# EAGLE board BlackBoard-Artemis-Panel (EAGLE 9.3.0), part 1 of 2
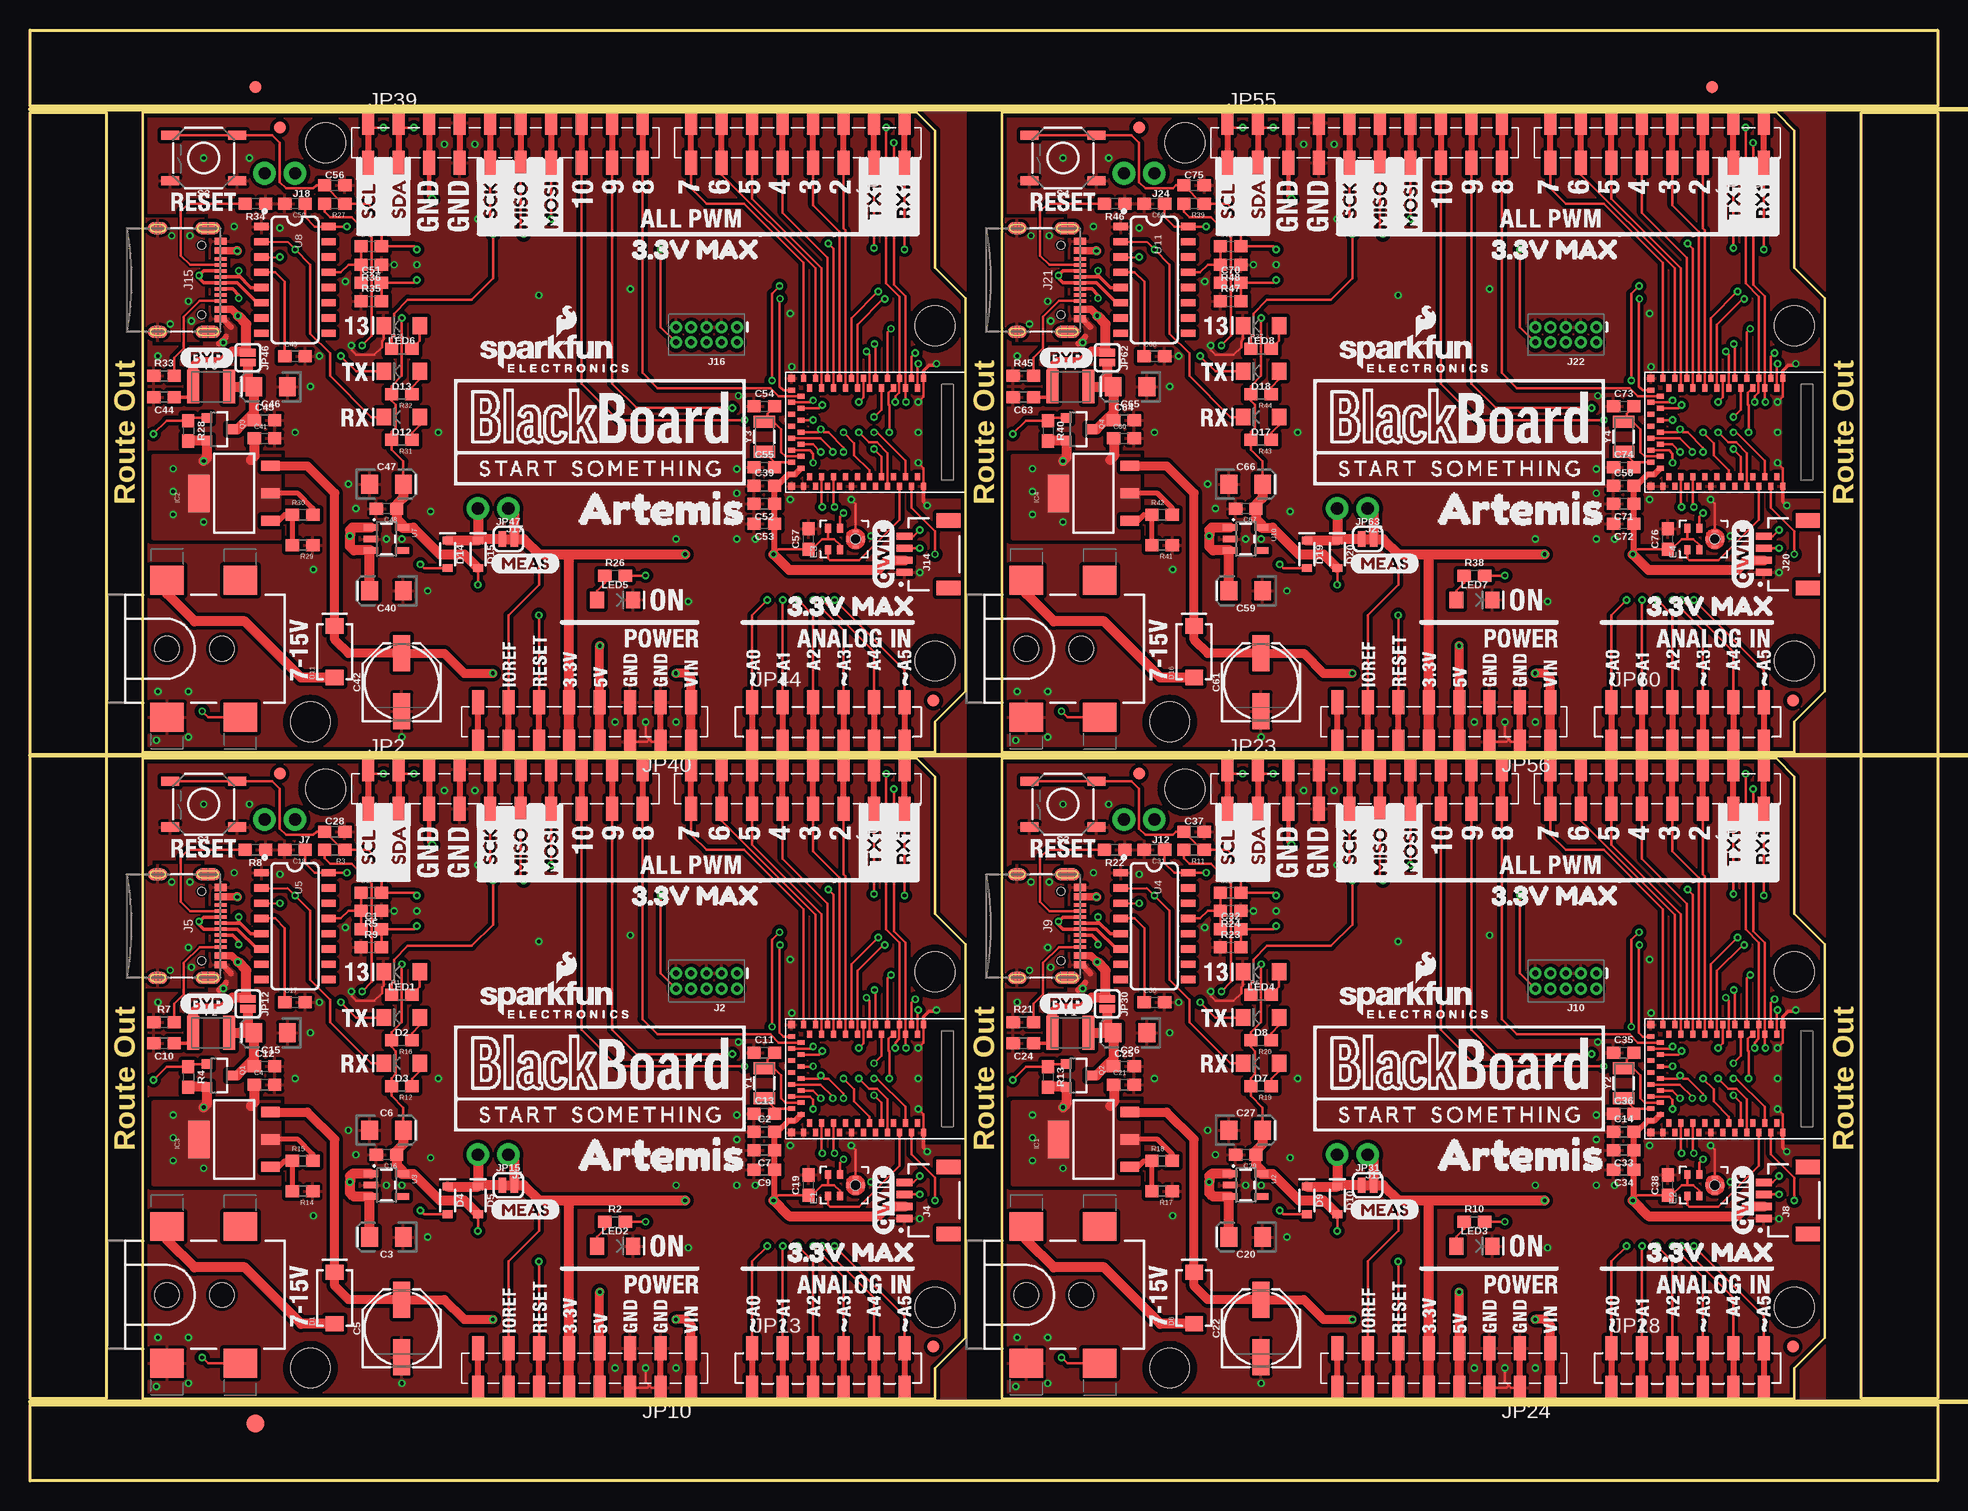
[diagram p0: board, top side]
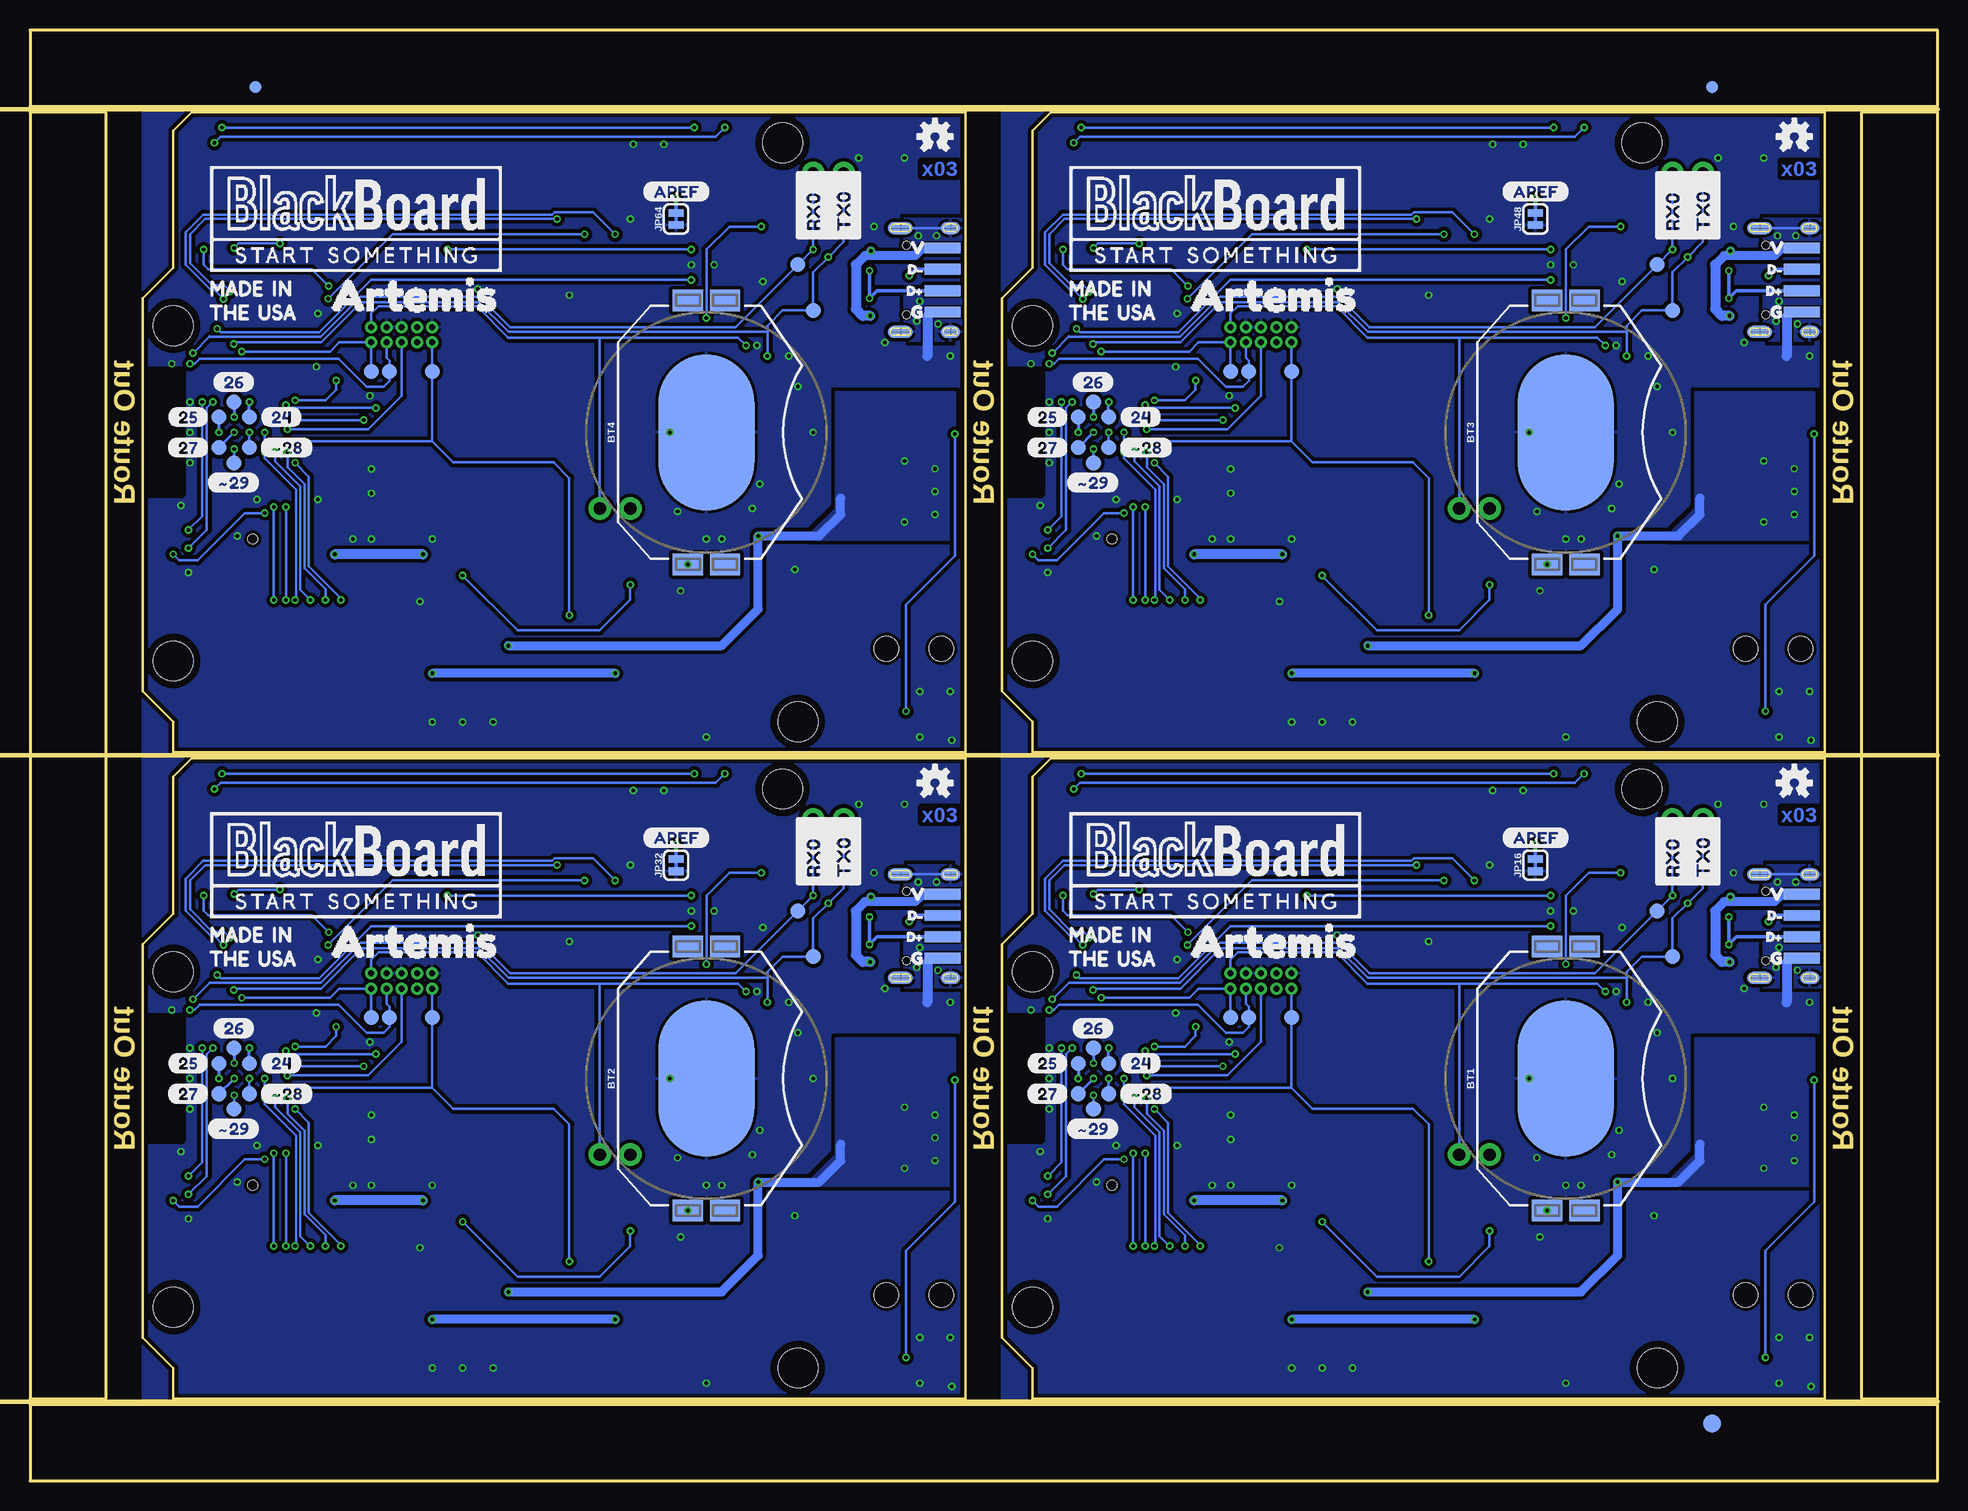
[diagram p1: board, bottom side, seen from below]

Size 159 x 120.9 mm. Coordinates in mm from the lower left corner, seen from the top.
Outline: 9.4,60.2 73.91,60.2 75.44,58.67 75.44,47.24 77.98,44.7 77.98,11.94 75.44,9.4 75.44,6.86 9.4,6.86 9.4,60.2
Outline: 81.03,60.2 145.54,60.2 147.07,58.67 147.07,47.24 149.61,44.7 149.61,11.94 147.07,9.4 147.07,6.86 81.03,6.86 81.03,60.2
Outline: 9.4,114.05 73.91,114.05 75.44,112.52 75.44,101.09 77.98,98.55 77.98,65.79 75.44,63.25 75.44,60.71 9.4,60.71 9.4,114.05
Outline: 81.03,114.05 145.54,114.05 147.07,112.52 147.07,101.09 149.61,98.55 149.61,65.79 147.07,63.25 147.07,60.71 81.03,60.71 81.03,114.05
Outline: 0,6.35 159,6.35 159,0 0,0 0,6.35
Outline: 152.65,114.05 159,114.05 159,6.86 152.65,6.86 152.65,114.05
Outline: 0,120.9 159,120.9 159,114.55 0,114.55 0,120.9
Outline: 0,114.05 6.35,114.05 6.35,6.86 0,6.86 0,114.05
Copper layers (1*16): Top 0.035mm / dielectric 1.5mm / Bottom 0.035mm
Design rules "SparkFun-2-layer-PCBWay-LIMIT": minimum track width 6mil, minimum drill 0.3mm, track to track 6mil, track to pad 6mil, pad to pad 6mil, via to via 6mil, smd to smd 6mil, copper to edge 6mil, drill to drill 6mil, minimum pad ring 6mil, minimum via ring 6mil, stop-mask expansion 4mil, vias tented up to drill 25mil, thermal gap 10mil
Net classes: 0 default: width 0 mm, drill 0 mm; 1 power: width 0.762 mm
tRestrict: area 74.8,28.4 to 78,38.6; area 146.4,28.4 to 149.6,38.6; area 74.8,82.3 to 78,92.5; area 146.4,82.3 to 149.6,92.5
bRestrict: area 74.8,28.4 to 78,38.6; area 146.4,28.4 to 149.6,38.6; area 74.8,82.3 to 78,92.5; area 146.4,82.3 to 149.6,92.5
vRestrict: area 10,29.2 to 11.4,37.5; area 15.1,30 to 16.8,37.5; area 57.3,17.7 to 57.9,18.2; area 59.8,17.5 to 60.3,18.4; area 20.7,36.2 to 22.1,38.5; area 9.7,19.8 to 18.8,31.9; area 81.7,29.2 to 83.1,37.5; area 86.7,30 to 88.4,37.5; area 128.9,17.7 to 129.5,18.2; area 131.4,17.5 to 132,18.4; area 92.3,36.2 to 93.7,38.5; area 81.3,19.8 to 90.4,31.9; 12 more areas
Milling: 3 lines

## Footprints (pad centres in the part's own frame; a part is rotated, then mirrored left to right if it is on the bottom)
BATTCON_20MM_4LEGS_OVERPASTE = smd 1.778 x 2.54: 1 -11,1.55; 3 11,1.55; P$1 -11,-1.55; P$2 11,-1.55 | smd 13 x 8: 2 0,0
0603 = smd 1.1 x 1: 1 -0.85,0; 2 0.85,0
EIA3216 = smd 1.4 x 1.6: + 1.4,0; - -1.4,0
PANASONIC_D = smd 3 x 1.4: + 2.4,0; - -2.4,0
SMA-DIODE = smd 1.27 x 1.47: A -2.15,0; C 2.15,0
LED-1206 = smd 1.2 x 1.4: A -1.5,0; C 1.5,0
SOD-323 = smd 0.63 x 0.83: A 1.15,0; C -1.15,0
SPH0641LM4H-1_MICROPHONE = smd 0.725 x 0.522: 1 -0.9,1.3; 2 -0.9,0.3; 4 0.9,0.3; 5 0.9,1.3 | smd 0.5 x 0.2: 3 0,-1.65; 8 0,-0.35 | smd 0.2 x 0.5: 6 -0.65,-1; 7 0.65,-1 | hole 0.8: 0,-1
FIDUCIAL-1X2 = smd 1 x 1: 1 0,0
FIDUCIAL-1.5X3 = smd 1.5 x 1.5: 1 0,0
1210 = smd 1 x 2.8: 1 -1.5,0; 2 1.5,0
SOT223-ALT1 = smd 0.838 x 1.524: 1 -2.271,-3.02; 2 0,-3.02; 3 2.288,-3.02 | smd 3.124 x 1.778: 4 0,2.921
1X02_NO_SILK = drill 1.016 pad 1.88: 1 0,0; 2 2.54,0
2X5-PTH-1.27MM-NO_SILK = drill 0.508 pad 1: 1 -2.54,-0.635; 2 -2.54,0.635; 3 -1.27,-0.635; 4 -1.27,0.635; 5 0,-0.635; 6 0,0.635; 7 1.27,-0.635; 8 1.27,0.635; 9 2.54,-0.635; 10 2.54,0.635
POWER_JACK_SMD_OVERPASTE_TOE = smd 2.8 x 2.4: GND 0,-5.7; P$4 6.1,-5.7; VIN0 0,5.7; VIN1 6.1,5.7 | hole 2.032: 0,0; 4.572,0
JST04_1MM_RA = smd 0.6 x 1.35: 1 -1.5,0; 2 -0.5,0; 3 0.5,0; 4 1.5,0 | smd 1.2 x 2: NC1 2.8,-3.675; NC2 -2.8,-3.675
USB-C-16P = smd 0.3 x 1.016: A5 -1.25,0.154; A6 -0.25,0.154; A7 0.25,0.154; A8 1.25,0.154; B5 1.75,0.154; B6 0.75,0.154; B7 -0.75,0.154; B8 -1.75,0.154 | smd 0.6 x 1.016: GND -3.225,0.154; GND2 3.225,0.154 | smd 1 x 2.1: SHLD1 -4.32,-0.915; SHLD2 4.32,-0.915 | smd 1 x 2.1 bottom: SHLD3 -4.32,-0.915; SHLD4 4.32,-0.915 | smd 1 x 1.6: SHLD5 -4.32,-5.095; SHLD8 4.32,-5.095 | smd 1 x 1.6 bottom: SHLD6 -4.32,-5.095; SHLD7 4.32,-5.095 | smd 0.55 x 1.016: VBUS1 -2.45,0.154; VBUS2 2.45,0.154 | hole 0.65: -2.89,-1.445; 2.89,-1.445
1X10_SMD_COMBINED = smd 1 x 2: 1A 0,1.65; 1B 0,-1.65; 2A 2.54,1.65; 2B 2.54,-1.65; 3A 5.08,1.65; 3B 5.08,-1.65; 4A 7.62,1.65; 4B 7.62,-1.65; 5A 10.16,1.65; 5B 10.16,-1.65; 6A 12.7,1.65; 6B 12.7,-1.65; 7A 15.24,1.65; 7B 15.24,-1.65; 8A 17.78,1.65; 8B 17.78,-1.65; 9A 20.32,1.65; 9B 20.32,-1.65; 10A 22.86,1.65; 10B 22.86,-1.65
STAND-OFF = hole 3.302: 0,0
1X08_SMD_COMBINED = smd 1 x 2: 1A 0,1.65; 1B 0,-1.65; 2A 2.54,-1.65; 2B 2.54,1.65; 3A 5.08,1.65; 3B 5.08,-1.65; 4A 7.62,-1.65; 4B 7.62,1.65; 5A 10.16,1.65; 5B 10.16,-1.65; 6A 12.7,-1.65; 6B 12.7,1.65; 7A 15.24,1.65; 7B 15.24,-1.65; 8A 17.78,-1.65; 8B 17.78,1.65
SMT-JUMPER_2_NO_SILK = smd 0.635 x 1.27: 1 -0.406,0; 2 0.406,0
1X06_SMD_STRAIGHT_COMBO = smd 1 x 2: 1A 0,-1.65; 1B 0,1.65; 2A 2.54,1.65; 2B 2.54,-1.65; 3A 5.08,-1.65; 3B 5.08,1.65; 4A 7.62,1.65; 4B 7.62,-1.65; 5A 10.16,-1.65; 5B 10.16,1.65; 6A 12.7,1.65; 6B 12.7,-1.65
USB-SOLDER-PADS = smd 3 x 0.9: D+ 0,-0.889; D- 0,0.889; GND 0,-2.667; VBUS 0,2.667
SMT-JUMPER_2_NC_TRACE_SILK = smd 0.635 x 1.27: 1 -0.508,0; 2 0.508,0
SOT23-3 = smd 0.8 x 0.9: 1 -0.95,-1; 2 0.95,-1; 3 0,1.1
TACTILE_SWITCH_SMD_5.2MM = smd 1.524 x 0.762: 1 -2.794,1.905; 2 2.794,1.905; 3 -2.794,-1.905; 4 2.794,-1.905
PAD.03X.05 = smd 1.27 x 1.27: P$1 0,0
ARTEMIS_FP = smd 0.4 x 0.6: AD16 -4,-3.7; BOOT 1.5,4.5; D0 0.5,-4.5; D1 -0.5,-4.5; D2 -1,-3.7; D3 2,-3.7; D7 -1.5,4.5; D8 -0.5,4.5; D9 2,3.7; D10 1,3.7; D14 -5,3.7; D17 -3.5,-4.5; D36 2.5,-4.5; D38 3,-3.7; D40 2.5,4.5; D41 -2.5,-4.5; GND@1 4.5,4.5; GND@39 -5.5,-4.5; GND@47 -1.5,-4.5; GND@59 4.5,-4.5; RXI-0 3.5,4.5; SWDCK 4,3.7; SWDIO 0,3.7; TXO-0 0.5,4.5; ~AD31 -3,-3.7; ~AD35 -2,3.7; ~D4 -2.5,4.5; ~D5 -1,3.7; ~D18 -4.5,-4.5; ~D19 -5,-3.7; ~D22 -3.5,4.5; ~D23 -4,3.7; ~D24 -3,3.7; ~D27 -4.5,4.5; ~D28 -5.5,4.5; ~D37 3.5,-4.5; ~D39 3,3.7; ~D42 1.5,-4.5; ~D43 1,-3.7; ~D44 4,-3.7; ~D45 -2,-3.7; ~RST 0,-3.7 | smd 0.6 x 0.4: AD34 -6.5,-0.5; D15 -6.5,0.5; VDD@36 -5.7,-3; VDD@37 -6.5,-3.5; XI -6.5,-2.5; XO -5.7,-2; ~AD11 -5.7,-1; ~AD12 -5.7,2; ~AD13 -5.7,1; ~AD29 -6.5,-1.5; ~AD32 -5.7,3; ~AD33/SWO -5.7,0; ~D6 -6.5,3.5; ~D25 -6.5,2.5; ~D26 -6.5,1.5 | smd 0.6 x 0.6: GND@22 -6.5,4.5; GND@38 -6.5,-4.5
SOT23-5 = smd 0.55 x 1.2: 1 -0.95,-1.3; 2 0,-1.3; 3 0.95,-1.3; 4 0.95,1.3; 5 -0.95,1.3
SO016 = smd 0.6 x 1.2: 1 -4.445,-2.8; 2 -3.175,-2.8; 3 -1.905,-2.8; 4 -0.635,-2.8; 5 0.635,-2.8; 6 1.905,-2.8; 7 3.175,-2.8; 8 4.445,-2.8; 9 4.445,2.8; 10 3.175,2.8; 11 1.905,2.8; 12 0.635,2.8; 13 -0.635,2.8; 14 -1.905,2.8; 15 -3.175,2.8; 16 -4.445,2.8
CRYSTAL-SMD-3.2X1.5MM = smd 1 x 1.8: P$1 -1.25,0; P$2 1.25,0

## Placement (x,y rotation side)
BT1  CR2032  [BATTCON_20MM_4LEGS_OVERPASTE]  30.99,33.53 90 bottom
BT2  CR2032  [BATTCON_20MM_4LEGS_OVERPASTE]  102.62,33.53 90 bottom
BT3  CR2032  [BATTCON_20MM_4LEGS_OVERPASTE]  30.99,87.38 90 bottom
BT4  CR2032  [BATTCON_20MM_4LEGS_OVERPASTE]  102.62,87.38 90 bottom
C1  2.2uF  [0603]  28.45,45.97 0 top
C2  0.1uF  [0603]  61.21,29.08 0 top
C3  10uF  [EIA3216]  29.72,20.32 180 top
C4  0.1uF  [0603]  19.56,33.02 0 top
C5  47uF  [PANASONIC_D]  30.99,12.7 90 top
C6  10uF  [EIA3216]  29.72,29.21 0 top
C7  10uF  [0603]  61.21,27.56 180 top
C8  0.1uF  [0603]  28.45,49.02 0 top
C9  1.0uF  [0603]  61.21,25.91 180 top
C10  0.1uF  [0603]  11.18,36.45 180 top
C11  15pF  [0603]  61.21,35.69 0 top
C12  0.1uF  [0603]  19.56,34.54 0 top
C13  15pF  [0603]  61.21,30.61 0 top
C14  0.1uF  [0603]  132.84,29.08 0 top
C15  10uF  [EIA3216]  20.07,37.34 180 top
C16  1.0uF  [0603]  29.72,27.18 180 top
C17  10nF  [0603]  22.1,39.88 0 top
C18  0.1uF  [0603]  22.1,52.58 180 top
C19  0.1uF  [0603]  64.9,24.64 90 top
C20  10uF  [EIA3216]  101.35,20.32 180 top
C21  0.1uF  [0603]  91.19,33.02 0 top
C22  47uF  [PANASONIC_D]  102.62,12.7 90 top
C23  0.1uF  [0603]  100.08,49.02 0 top
C24  0.1uF  [0603]  82.8,36.45 180 top
C25  0.1uF  [0603]  91.19,34.54 0 top
C26  10uF  [EIA3216]  91.69,37.34 180 top
C27  10uF  [EIA3216]  101.35,29.21 0 top
C28  1nF  [0603]  25.4,54.1 0 top
C29  1.0uF  [0603]  101.35,27.18 180 top
C30  10nF  [0603]  93.73,39.88 0 top
C31  0.1uF  [0603]  93.73,52.58 180 top
C32  2.2uF  [0603]  100.08,45.97 0 top
C33  10uF  [0603]  132.84,27.56 180 top
C34  1.0uF  [0603]  132.84,25.91 180 top
C35  15pF  [0603]  132.84,35.69 0 top
C36  15pF  [0603]  132.84,30.61 0 top
C37  1nF  [0603]  97.03,54.1 0 top
C38  0.1uF  [0603]  136.53,24.64 90 top
C39  0.1uF  [0603]  61.21,82.93 0 top
C40  10uF  [EIA3216]  29.72,74.17 180 top
C41  0.1uF  [0603]  19.56,86.87 0 top
C42  47uF  [PANASONIC_D]  30.99,66.55 90 top
C43  0.1uF  [0603]  28.45,102.87 0 top
C44  0.1uF  [0603]  11.18,90.3 180 top
C45  0.1uF  [0603]  19.56,88.39 0 top
C46  10uF  [EIA3216]  20.07,91.19 180 top
C47  10uF  [EIA3216]  29.72,83.06 0 top
C48  1.0uF  [0603]  29.72,81.03 180 top
C49  10nF  [0603]  22.1,93.73 0 top
C50  0.1uF  [0603]  22.1,106.43 180 top
C51  2.2uF  [0603]  28.45,99.82 0 top
C52  10uF  [0603]  61.21,81.41 180 top
C53  1.0uF  [0603]  61.21,79.76 180 top
C54  15pF  [0603]  61.21,89.54 0 top
C55  15pF  [0603]  61.21,84.45 0 top
C56  1nF  [0603]  25.4,107.95 0 top
C57  0.1uF  [0603]  64.9,78.49 90 top
C58  0.1uF  [0603]  132.84,82.93 0 top
C59  10uF  [EIA3216]  101.35,74.17 180 top
C60  0.1uF  [0603]  91.19,86.87 0 top
C61  47uF  [PANASONIC_D]  102.62,66.55 90 top
C62  0.1uF  [0603]  100.08,102.87 0 top
C63  0.1uF  [0603]  82.8,90.3 180 top
C64  0.1uF  [0603]  91.19,88.39 0 top
C65  10uF  [EIA3216]  91.69,91.19 180 top
C66  10uF  [EIA3216]  101.35,83.06 0 top
C67  1.0uF  [0603]  101.35,81.03 180 top
C68  10nF  [0603]  93.73,93.73 0 top
C69  0.1uF  [0603]  93.73,106.43 180 top
C70  2.2uF  [0603]  100.08,99.82 0 top
C71  10uF  [0603]  132.84,81.41 180 top
C72  1.0uF  [0603]  132.84,79.76 180 top
C73  15pF  [0603]  132.84,89.54 0 top
C74  15pF  [0603]  132.84,84.45 0 top
C75  1nF  [0603]  97.03,107.95 0 top
C76  0.1uF  [0603]  136.53,78.49 90 top
D1  1A/40V/500mV  [SMA-DIODE]  25.4,15.24 90 top
D2  GREEN  [LED-1206]  30.99,38.61 180 top
D3  Yellow  [LED-1206]  30.99,34.8 180 top
D4  1A/23V/620mV  [SOD-323]  34.8,23.37 270 top
D5  1A/23V/620mV  [SOD-323]  37.34,23.37 270 top
D6  1A/40V/500mV  [SMA-DIODE]  97.03,15.24 90 top
D7  Yellow  [LED-1206]  102.62,34.8 180 top
D8  GREEN  [LED-1206]  102.62,38.61 180 top
D9  1A/23V/620mV  [SOD-323]  106.43,23.37 270 top
D10  1A/23V/620mV  [SOD-323]  108.97,23.37 270 top
D11  1A/40V/500mV  [SMA-DIODE]  25.4,69.09 90 top
D12  Yellow  [LED-1206]  30.99,88.65 180 top
D13  GREEN  [LED-1206]  30.99,92.46 180 top
D14  1A/23V/620mV  [SOD-323]  34.8,77.22 270 top
D15  1A/23V/620mV  [SOD-323]  37.34,77.22 270 top
D16  1A/40V/500mV  [SMA-DIODE]  97.03,69.09 90 top
D17  Yellow  [LED-1206]  102.62,88.65 180 top
D18  GREEN  [LED-1206]  102.62,92.46 180 top
D19  1A/23V/620mV  [SOD-323]  106.43,77.22 270 top
D20  1A/23V/620mV  [SOD-323]  108.97,77.22 270 top
E1  SPH0641LM4H-1  [SPH0641LM4H-1_MICROPHONE]  67.82,24.64 90 top
E2  SPH0641LM4H-1  [SPH0641LM4H-1_MICROPHONE]  139.45,24.64 90 top
E3  SPH0641LM4H-1  [SPH0641LM4H-1_MICROPHONE]  67.82,78.49 90 top
E4  SPH0641LM4H-1  [SPH0641LM4H-1_MICROPHONE]  139.45,78.49 90 top
E$1  [FIDUCIAL-1X2]  18.8,116.14 0 top
E$2  [FIDUCIAL-1X2]  18.8,116.14 0 bottom
E$3  [FIDUCIAL-1X2]  140.21,116.14 0 top
E$4  [FIDUCIAL-1X2]  140.21,116.14 0 bottom
E$5  [FIDUCIAL-1.5X3]  18.8,4.76 0 top
E$6  [FIDUCIAL-1.5X3]  18.8,4.76 0 bottom
F1  6V/2A  [1210]  86.74,37.34 0 top
F2  6V/2A  [1210]  15.11,37.34 0 top
F3  6V/2A  [1210]  15.11,91.19 0 top
F4  6V/2A  [1210]  86.74,91.19 0 top
FRAME1  FRAME-LETTERNO_PACKAGE  [DUMMY]  117.86,28.45 270 bottom
FRAME2  FRAME-LETTERNO_PACKAGE  [DUMMY]  46.23,28.45 270 bottom
FRAME3  FRAME-LETTERNO_PACKAGE  [DUMMY]  46.23,82.3 270 bottom
FRAME4  FRAME-LETTERNO_PACKAGE  [DUMMY]  117.86,82.3 270 bottom
IC1  LM1117  [SOT223-ALT1]  88.65,28.45 90 top
IC2  LM1117  [SOT223-ALT1]  17.02,82.3 90 top
IC3  LM1117  [SOT223-ALT1]  17.02,28.45 90 top
IC4  LM1117  [SOT223-ALT1]  88.65,82.3 90 top
J1  [1X02_NO_SILK]  39.88,27.18 180 top
J2  CORTEX_DEBUG  [2X5-PTH-1.27MM-NO_SILK]  56.39,41.66 180 top
J3  POWER_JACKTOE  [POWER_JACK_SMD_OVERPASTE_TOE]  11.43,15.49 0 top
J4  [JST04_1MM_RA]  72.9,23.37 90 top
J5  USB-C  [USB-C-16P]  15.75,46.23 270 top
J6  POWER_JACKTOE  [POWER_JACK_SMD_OVERPASTE_TOE]  83.06,15.49 0 top
J7  [1X02_NO_SILK]  22.1,55.12 180 top
J8  [JST04_1MM_RA]  144.53,23.37 90 top
J9  USB-C  [USB-C-16P]  87.38,46.23 270 top
J10  CORTEX_DEBUG  [2X5-PTH-1.27MM-NO_SILK]  128.02,41.66 180 top
J11  [1X02_NO_SILK]  111.51,27.18 180 top
J12  [1X02_NO_SILK]  93.73,55.12 180 top
J13  POWER_JACKTOE  [POWER_JACK_SMD_OVERPASTE_TOE]  11.43,69.34 0 top
J14  [JST04_1MM_RA]  72.9,77.22 90 top
J15  USB-C  [USB-C-16P]  15.75,100.08 270 top
J16  CORTEX_DEBUG  [2X5-PTH-1.27MM-NO_SILK]  56.39,95.5 180 top
J17  [1X02_NO_SILK]  39.88,81.03 180 top
J18  [1X02_NO_SILK]  22.1,108.97 180 top
J19  POWER_JACKTOE  [POWER_JACK_SMD_OVERPASTE_TOE]  83.06,69.34 0 top
J20  [JST04_1MM_RA]  144.53,77.22 90 top
J21  USB-C  [USB-C-16P]  87.38,100.08 270 top
J22  CORTEX_DEBUG  [2X5-PTH-1.27MM-NO_SILK]  128.02,95.5 180 top
J23  [1X02_NO_SILK]  111.51,81.03 180 top
J24  [1X02_NO_SILK]  93.73,108.97 180 top
JP1  SFE_LOGO_NAME.1_INCH  [SFE_LOGO_NAME_.1]  43.05,40.26 0 top
JP2  M10SMD_COMBO  [1X10_SMD_COMBINED]  28.19,57.66 0 top
JP3  STAND-OFF  [STAND-OFF]  23.37,9.4 0 top
JP4  STAND-OFF  [STAND-OFF]  75.44,14.48 0 top
JP5  STAND-OFF  [STAND-OFF]  75.44,42.42 0 top
JP6  STAND-OFF  [STAND-OFF]  24.64,57.66 0 top
JP7  SFE_LOGO_FLAME.1_INCH  [SFE_LOGO_FLAME_.1]  44.7,42.8 0 top
JP8  FIDUCIAL1X2  [FIDUCIAL-1X2]  75.31,11.18 0 top
JP9  FIDUCIAL1X2  [FIDUCIAL-1X2]  20.83,58.93 0 top
JP10  [1X08_SMD_COMBINED]  55.12,9.4 180 top
JP11  JP11  [1X08_SMD_COMBINED]  72.9,57.66 180 top
JP12  [SMT-JUMPER_2_NO_SILK]  18.16,39.75 270 top
JP13  [1X06_SMD_STRAIGHT_COMBO]  60.2,9.4 0 top
JP14  USB_SOLDER_PADS  [USB-SOLDER-PADS]  11.3,46.23 0 bottom
JP15  [SMT-JUMPER_2_NC_TRACE_SILK]  39.88,24.64 0 top
JP16  [SMT-JUMPER_2_NC_TRACE_SILK]  33.53,51.31 90 bottom
JP17  STAND-OFF  [STAND-OFF]  95,9.4 0 top
JP18  STAND-OFF  [STAND-OFF]  147.07,14.48 0 top
JP19  STAND-OFF  [STAND-OFF]  147.07,42.42 0 top
JP20  STAND-OFF  [STAND-OFF]  96.27,57.66 0 top
JP21  FIDUCIAL1X2  [FIDUCIAL-1X2]  146.94,11.18 0 top
JP22  FIDUCIAL1X2  [FIDUCIAL-1X2]  92.46,58.93 0 top
JP23  M10SMD_COMBO  [1X10_SMD_COMBINED]  99.82,57.66 0 top
JP24  [1X08_SMD_COMBINED]  126.75,9.4 180 top
JP25  SFE_LOGO_NAME.1_INCH  [SFE_LOGO_NAME_.1]  114.68,40.26 0 top
JP26  SFE_LOGO_FLAME.1_INCH  [SFE_LOGO_FLAME_.1]  116.33,42.8 0 top
JP27  JP11  [1X08_SMD_COMBINED]  144.53,57.66 180 top
JP28  [1X06_SMD_STRAIGHT_COMBO]  131.83,9.4 0 top
JP29  USB_SOLDER_PADS  [USB-SOLDER-PADS]  82.93,46.23 0 bottom
JP30  [SMT-JUMPER_2_NO_SILK]  89.79,39.75 270 top
JP31  [SMT-JUMPER_2_NC_TRACE_SILK]  111.51,24.64 0 top
JP32  [SMT-JUMPER_2_NC_TRACE_SILK]  105.16,51.31 90 bottom
JP33  STAND-OFF  [STAND-OFF]  23.37,63.25 0 top
JP34  STAND-OFF  [STAND-OFF]  75.44,68.33 0 top
JP35  STAND-OFF  [STAND-OFF]  75.44,96.27 0 top
JP36  STAND-OFF  [STAND-OFF]  24.64,111.51 0 top
JP37  FIDUCIAL1X2  [FIDUCIAL-1X2]  75.31,65.02 0 top
JP38  FIDUCIAL1X2  [FIDUCIAL-1X2]  20.83,112.78 0 top
JP39  M10SMD_COMBO  [1X10_SMD_COMBINED]  28.19,111.51 0 top
JP40  [1X08_SMD_COMBINED]  55.12,63.25 180 top
JP41  SFE_LOGO_NAME.1_INCH  [SFE_LOGO_NAME_.1]  43.05,94.11 0 top
JP42  SFE_LOGO_FLAME.1_INCH  [SFE_LOGO_FLAME_.1]  44.7,96.65 0 top
JP43  JP11  [1X08_SMD_COMBINED]  72.9,111.51 180 top
JP44  [1X06_SMD_STRAIGHT_COMBO]  60.2,63.25 0 top
JP45  USB_SOLDER_PADS  [USB-SOLDER-PADS]  11.3,100.08 0 bottom
JP46  [SMT-JUMPER_2_NO_SILK]  18.16,93.6 270 top
JP47  [SMT-JUMPER_2_NC_TRACE_SILK]  39.88,78.49 0 top
JP48  [SMT-JUMPER_2_NC_TRACE_SILK]  33.53,105.16 90 bottom
JP49  STAND-OFF  [STAND-OFF]  95,63.25 0 top
JP50  STAND-OFF  [STAND-OFF]  147.07,68.33 0 top
JP51  STAND-OFF  [STAND-OFF]  147.07,96.27 0 top
JP52  STAND-OFF  [STAND-OFF]  96.27,111.51 0 top
JP53  FIDUCIAL1X2  [FIDUCIAL-1X2]  146.94,65.02 0 top
JP54  FIDUCIAL1X2  [FIDUCIAL-1X2]  92.46,112.78 0 top
JP55  M10SMD_COMBO  [1X10_SMD_COMBINED]  99.82,111.51 0 top
JP56  [1X08_SMD_COMBINED]  126.75,63.25 180 top
JP57  SFE_LOGO_NAME.1_INCH  [SFE_LOGO_NAME_.1]  114.68,94.11 0 top
JP58  SFE_LOGO_FLAME.1_INCH  [SFE_LOGO_FLAME_.1]  116.33,96.65 0 top
JP59  JP11  [1X08_SMD_COMBINED]  144.53,111.51 180 top
JP60  [1X06_SMD_STRAIGHT_COMBO]  131.83,63.25 0 top
JP61  USB_SOLDER_PADS  [USB-SOLDER-PADS]  82.93,100.08 0 bottom
JP62  [SMT-JUMPER_2_NO_SILK]  89.79,93.6 270 top
JP63  [SMT-JUMPER_2_NC_TRACE_SILK]  111.51,78.49 0 top
JP64  [SMT-JUMPER_2_NC_TRACE_SILK]  105.16,105.16 90 bottom
LED1  BLUE  [LED-1206]  30.99,42.42 180 top
LED2  GREEN  [LED-1206]  48.77,19.56 0 top
LED3  GREEN  [LED-1206]  120.4,19.56 0 top
LED4  BLUE  [LED-1206]  102.62,42.42 180 top
LED5  GREEN  [LED-1206]  48.77,73.41 0 top
LED6  BLUE  [LED-1206]  30.99,96.27 180 top
LED7  GREEN  [LED-1206]  120.4,73.41 0 top
LED8  BLUE  [LED-1206]  102.62,96.27 180 top
Q1  1.1A/60V/600mΩ  [SOT23-3]  15.75,33.78 270 top
Q2  1.1A/60V/600mΩ  [SOT23-3]  87.38,33.78 270 top
Q3  1.1A/60V/600mΩ  [SOT23-3]  15.75,87.63 270 top
Q4  1.1A/60V/600mΩ  [SOT23-3]  87.38,87.63 270 top
R1  4.7k  [0603]  30.99,40.51 0 top
R2  10k  [0603]  48.77,21.59 0 top
R3  100k  [0603]  25.4,52.58 180 top
R4  10k  [0603]  13.21,33.66 270 top
R5  100k  [0603]  28.45,47.5 180 top
R6  4.7k  [0603]  102.62,40.51 0 top
R7  5.1k  [0603]  11.18,38.23 0 top
R8  5.1k  [0603]  18.8,52.58 180 top
R9  10k  [0603]  28.45,44.45 0 top
R10  10k  [0603]  120.4,21.59 0 top
R11  100k  [0603]  97.03,52.58 180 top
R12  4.7k  [0603]  30.99,32.89 180 top
R13  10k  [0603]  84.84,33.66 270 top
R14  715  [0603]  22.73,24.13 180 top
R15  240  [0603]  22.73,26.67 0 top
R16  4.7k  [0603]  30.99,36.7 180 top
R17  715  [0603]  94.36,24.13 180 top
R18  240  [0603]  94.36,26.67 0 top
R19  4.7k  [0603]  102.62,32.89 180 top
R20  4.7k  [0603]  102.62,36.7 180 top
R21  5.1k  [0603]  82.8,38.23 0 top
R22  5.1k  [0603]  90.42,52.58 180 top
R23  10k  [0603]  100.08,44.45 0 top
R24  100k  [0603]  100.08,47.5 180 top
R25  4.7k  [0603]  30.99,94.36 0 top
R26  10k  [0603]  48.77,75.44 0 top
R27  100k  [0603]  25.4,106.43 180 top
R28  10k  [0603]  13.21,87.5 270 top
R29  715  [0603]  22.73,77.98 180 top
R30  240  [0603]  22.73,80.52 0 top
R31  4.7k  [0603]  30.99,86.74 180 top
R32  4.7k  [0603]  30.99,90.55 180 top
R33  5.1k  [0603]  11.18,92.08 0 top
R34  5.1k  [0603]  18.8,106.43 180 top
R35  10k  [0603]  28.45,98.3 0 top
R36  100k  [0603]  28.45,101.35 180 top
R37  4.7k  [0603]  102.62,94.36 0 top
R38  10k  [0603]  120.4,75.44 0 top
R39  100k  [0603]  97.03,106.43 180 top
R40  10k  [0603]  84.84,87.5 270 top
R41  715  [0603]  94.36,77.98 180 top
R42  240  [0603]  94.36,80.52 0 top
R43  4.7k  [0603]  102.62,86.74 180 top
R44  4.7k  [0603]  102.62,90.55 180 top
R45  5.1k  [0603]  82.8,92.08 0 top
R46  5.1k  [0603]  90.42,106.43 180 top
R47  10k  [0603]  100.08,98.3 0 top
R48  100k  [0603]  100.08,101.35 180 top
S1  [TACTILE_SWITCH_SMD_5.2MM]  14.48,56.39 180 top
S2  [TACTILE_SWITCH_SMD_5.2MM]  86.11,56.39 180 top
S3  [TACTILE_SWITCH_SMD_5.2MM]  14.48,110.24 180 top
S4  [TACTILE_SWITCH_SMD_5.2MM]  86.11,110.24 180 top
TP1  [PAD.03X.05]  57.4,38.61 90 bottom
TP2  [PAD.03X.05]  58.93,38.61 90 bottom
TP3  [PAD.03X.05]  53.85,38.61 0 bottom
TP4  [PAD.03X.05]  129.03,38.61 90 bottom
TP5  TEST-POINT3X5  [PAD.03X.05]  23.37,47.5 90 bottom
TP6  TEST-POINT3X5  [PAD.03X.05]  22.1,43.69 90 bottom
TP7  [PAD.03X.05]  130.56,38.61 90 bottom
TP8  [PAD.03X.05]  70.36,30.99 270 bottom
TP9  [PAD.03X.05]  69.09,32.26 270 bottom
TP10  TEST-POINT3X5  [PAD.03X.05]  95,47.5 90 bottom
TP11  [PAD.03X.05]  71.63,32.26 0 bottom
TP12  [PAD.03X.05]  69.09,34.8 0 bottom
TP13  [PAD.03X.05]  71.63,34.8 0 bottom
TP14  [PAD.03X.05]  70.36,36.07 0 bottom
TP15  TEST-POINT3X5  [PAD.03X.05]  93.73,43.69 90 bottom
TP16  [PAD.03X.05]  125.48,38.61 0 bottom
TP17  [PAD.03X.05]  141.99,30.99 270 bottom
TP18  [PAD.03X.05]  140.72,32.26 270 bottom
TP19  [PAD.03X.05]  143.26,32.26 0 bottom
TP20  [PAD.03X.05]  140.72,34.8 0 bottom
TP21  [PAD.03X.05]  143.26,34.8 0 bottom
TP22  [PAD.03X.05]  141.99,36.07 0 bottom
TP23  [PAD.03X.05]  57.4,92.46 90 bottom
TP24  [PAD.03X.05]  58.93,92.46 90 bottom
TP25  TEST-POINT3X5  [PAD.03X.05]  23.37,101.35 90 bottom
TP26  TEST-POINT3X5  [PAD.03X.05]  22.1,97.54 90 bottom
TP27  [PAD.03X.05]  53.85,92.46 0 bottom
TP28  [PAD.03X.05]  70.36,84.84 270 bottom
TP29  [PAD.03X.05]  69.09,86.11 270 bottom
TP30  [PAD.03X.05]  71.63,86.11 0 bottom
TP31  [PAD.03X.05]  69.09,88.65 0 bottom
TP32  [PAD.03X.05]  71.63,88.65 0 bottom
TP33  [PAD.03X.05]  70.36,89.92 0 bottom
TP34  [PAD.03X.05]  129.03,92.46 90 bottom
TP35  [PAD.03X.05]  130.56,92.46 90 bottom
TP36  TEST-POINT3X5  [PAD.03X.05]  95,101.35 90 bottom
TP37  TEST-POINT3X5  [PAD.03X.05]  93.73,97.54 90 bottom
TP38  [PAD.03X.05]  125.48,92.46 0 bottom
TP39  [PAD.03X.05]  141.99,84.84 270 bottom
TP40  [PAD.03X.05]  140.72,86.11 270 bottom
TP41  [PAD.03X.05]  143.26,86.11 0 bottom
TP42  [PAD.03X.05]  140.72,88.65 0 bottom
TP43  [PAD.03X.05]  143.26,88.65 0 bottom
TP44  [PAD.03X.05]  141.99,89.92 0 bottom
U1  ARTEMIS_MODULESMD  [ARTEMIS_FP]  69.98,33.53 0 top
U2  AP2112-3.3V  [SOT23-5]  101.35,24.64 270 top
U3  AP2112-3.3V  [SOT23-5]  29.72,24.64 270 top
U4  CH340C  [SO016]  93.73,46.23 270 top
U5  CH340C  [SO016]  22.1,46.23 270 top
U6  ARTEMIS_MODULESMD  [ARTEMIS_FP]  141.6,33.53 0 top
U7  AP2112-3.3V  [SOT23-5]  29.72,78.49 270 top
U8  CH340C  [SO016]  22.1,100.08 270 top
U9  ARTEMIS_MODULESMD  [ARTEMIS_FP]  69.98,87.38 0 top
U10  AP2112-3.3V  [SOT23-5]  101.35,78.49 270 top
U11  CH340C  [SO016]  93.73,100.08 270 top
U12  ARTEMIS_MODULESMD  [ARTEMIS_FP]  141.6,87.38 0 top
U$1  [BLACKBOARDLOGO#PNG]  47.5,33.53 0 top
U$2  [D#3]  14.99,45.34 0 bottom
U$3  [BLACKBOARDLOGO#PNG]  60.2,51.31 0 bottom
U$4  [MADEINUSA#PNG]  68.83,44.45 0 bottom
U$5  OSHW-LOGOS  [OSHW-LOGO-S]  83.57,58.17 0 bottom
U$6  [BLACKBOARDLOGO#PNG]  119.13,33.53 0 top
U$7  [BLACKBOARDLOGO#PNG]  131.83,51.31 0 bottom
U$8  [MADEINUSA#PNG]  140.46,44.45 0 bottom
U$9  [QWIIC_COPYRIGHT_SMALL]  71.12,23.37 90 top
U$10  [D#4]  14.86,47.12 0 bottom
U$11  [G1]  14.86,43.56 0 bottom
U$12  [V0]  14.86,48.89 0 bottom
U$13  [3#3V_MAX2]  61.72,19.05 0 top
U$14  [ARTEMIS0]  43.43,27.18 0 top
U$15  [ARTEMIS0]  64.52,44.96 0 bottom
U$16  OSHW-LOGOS  [OSHW-LOGO-S]  11.94,58.17 0 bottom
U$17  [#284]  68.2,32.26 0 bottom
U$18  [SCL1]  28.19,50.29 90 top
U$19  [#295]  72.64,29.34 0 bottom
U$20  [AREF2]  36.32,53.59 0 bottom
U$21  [240]  68.2,34.8 0 bottom
U$22  [SDA0]  30.73,50.29 90 top
U$23  [251]  75.95,34.8 0 bottom
U$24  [262]  72.14,37.72 0 bottom
U$25  [273]  75.95,32.26 0 bottom
U$26  [QWIIC_COPYRIGHT_SMALL]  142.75,23.37 90 top
U$27  [G1]  86.49,43.56 0 bottom
U$28  [V0]  86.49,48.89 0 bottom
U$29  [D#3]  86.61,45.34 0 bottom
U$30  [D#4]  86.49,47.12 0 bottom
U$31  [ARTEMIS0]  115.06,27.18 0 top
U$32  [ARTEMIS0]  136.14,44.96 0 bottom
U$33  [MISO8]  112.52,49.4 90 top
U$34  [MOSI7]  115.06,49.4 90 top
U$35  [SCK9]  109.98,50.29 90 top
U$36  [3#3V_MAX2]  120.4,48.77 0 top
U$37  [MEAS3]  109.98,22.61 0 top
U$38  [RX11]  144.4,50.29 90 top
U$39  [TX10]  141.99,50.16 90 top
U$40  [RX01]  93.73,49.28 90 bottom
U$41  [TX00]  91.19,49.28 90 bottom
U$42  [AREF2]  107.95,53.59 0 bottom
U$43  [SCL1]  99.82,50.29 90 top
U$44  [SDA0]  102.36,50.29 90 top
U$45  [BYP0]  84.07,39.75 0 top
U$46  [3#3V_MAX2]  133.35,19.05 0 top
U$47  [MISO8]  40.89,49.4 90 top
U$48  [MOSI7]  43.43,49.4 90 top
U$49  [RX01]  22.1,49.28 90 bottom
U$50  [SCK9]  38.35,50.29 90 top
U$51  [#284]  139.83,32.26 0 bottom
U$52  [#295]  144.27,29.34 0 bottom
U$53  [TX00]  19.56,49.28 90 bottom
U$54  [240]  139.83,34.8 0 bottom
U$55  [251]  147.57,34.8 0 bottom
U$56  [262]  143.76,37.72 0 bottom
U$57  [273]  147.57,32.26 0 bottom
U$58  OSHW-LOGOS  [OSHW-LOGO-S]  11.94,112.01 0 bottom
U$59  [BLACKBOARDLOGO#PNG]  47.5,87.38 0 top
U$60  [BLACKBOARDLOGO#PNG]  60.2,105.16 0 bottom
U$61  [MADEINUSA#PNG]  68.83,98.3 0 bottom
U$62  [QWIIC_COPYRIGHT_SMALL]  71.12,77.22 90 top
U$63  [G1]  14.86,97.41 0 bottom
U$64  [V0]  14.86,102.74 0 bottom
U$65  [D#3]  14.99,99.19 0 bottom
U$66  [D#4]  14.86,100.97 0 bottom
U$67  [3#3V_MAX2]  48.77,48.77 0 top
U$68  [BYP0]  12.45,39.75 0 top
U$69  [ARTEMIS0]  43.43,81.03 0 top
U$70  [MEAS3]  38.35,22.61 0 top
U$71  [RX11]  72.77,50.29 90 top
U$72  [TX10]  70.36,50.16 90 top
U$73  [ARTEMIS0]  64.52,98.81 0 bottom
U$74  [MISO8]  40.89,103.25 90 top
U$75  [MOSI7]  43.43,103.25 90 top
U$76  [SCK9]  38.35,104.14 90 top
U$77  [3#3V_MAX2]  48.77,102.62 0 top
U$78  [MEAS3]  38.35,76.45 0 top
U$79  [RX11]  72.77,104.14 90 top
U$80  [TX10]  70.36,104.01 90 top
U$81  [RX01]  22.1,103.12 90 bottom
U$82  [TX00]  19.56,103.12 90 bottom
U$83  [AREF2]  36.32,107.44 0 bottom
U$84  [SCL1]  28.19,104.14 90 top
U$85  [SDA0]  30.73,104.14 90 top
U$86  [BYP0]  12.45,93.6 0 top
U$87  [3#3V_MAX2]  61.72,72.9 0 top
U$88  [#284]  68.2,86.11 0 bottom
U$89  [#295]  72.64,83.19 0 bottom
U$90  [240]  68.2,88.65 0 bottom
U$91  [251]  75.95,88.65 0 bottom
U$92  [262]  72.14,91.57 0 bottom
U$93  [273]  75.95,86.11 0 bottom
U$94  OSHW-LOGOS  [OSHW-LOGO-S]  83.57,112.01 0 bottom
U$95  [BLACKBOARDLOGO#PNG]  119.13,87.38 0 top
U$96  [BLACKBOARDLOGO#PNG]  131.83,105.16 0 bottom
U$97  [MADEINUSA#PNG]  140.46,98.3 0 bottom
U$98  [QWIIC_COPYRIGHT_SMALL]  142.75,77.22 90 top
U$99  [G1]  86.49,97.41 0 bottom
U$100  [V0]  86.49,102.74 0 bottom
U$101  [D#3]  86.61,99.19 0 bottom
U$102  [D#4]  86.49,100.97 0 bottom
U$103  [ARTEMIS0]  115.06,81.03 0 top
U$104  [ARTEMIS0]  136.14,98.81 0 bottom
U$105  [MISO8]  112.52,103.25 90 top
U$106  [MOSI7]  115.06,103.25 90 top
U$107  [SCK9]  109.98,104.14 90 top
U$108  [3#3V_MAX2]  120.4,102.62 0 top
U$109  [MEAS3]  109.98,76.45 0 top
U$110  [RX11]  144.4,104.14 90 top
U$111  [TX10]  141.99,104.01 90 top
U$112  [RX01]  93.73,103.12 90 bottom
U$113  [TX00]  91.19,103.12 90 bottom
U$114  [AREF2]  107.95,107.44 0 bottom
U$115  [SCL1]  99.82,104.14 90 top
U$116  [SDA0]  102.36,104.14 90 top
U$117  [BYP0]  84.07,93.6 0 top
U$118  [3#3V_MAX2]  133.35,72.9 0 top
U$119  [#284]  139.83,86.11 0 bottom
U$120  [#295]  144.27,83.19 0 bottom
U$121  [240]  139.83,88.65 0 bottom
U$122  [251]  147.57,88.65 0 bottom
U$123  [262]  143.76,91.57 0 bottom
U$124  [273]  147.57,86.11 0 bottom
Y1  32.768kHz  [CRYSTAL-SMD-3.2X1.5MM]  61.21,33.15 90 top
Y2  32.768kHz  [CRYSTAL-SMD-3.2X1.5MM]  132.84,33.15 90 top
Y3  32.768kHz  [CRYSTAL-SMD-3.2X1.5MM]  61.21,87 90 top
Y4  32.768kHz  [CRYSTAL-SMD-3.2X1.5MM]  132.84,87 90 top

## Library data of the parts
BT1-BT4 = SparkFun-Batteries; PROD_ID: PRT-11892; SF_SKU: BATT-10373
C1 C32 C51 C70 = SparkFun-Capacitors; PROD_ID: CAP-07888
C2 C4 C10 C12 C14 C18 C19 C21 C24 C25 C31 C38 C39 C41 C44 C45 C50 C57 C58 C60 C63 C64 C69 C76 = SparkFun-Capacitors; PROD_ID: CAP-00810
C3 C6 C15 C20 C26 C27 C40 C46 C47 C59 C65 C66 = SparkFun-Capacitors; PROD_ID: CAP-00811
C5 C22 C42 C61 = SparkFun-Capacitors; PROD_ID: CAP-08478
C7 C33 C52 C71 = SparkFun-Capacitors; PROD_ID: CAP-11015
C8 C23 C43 C62 = SparkFun-Capacitors; PROD_ID: CAP-08604
C9 C16 C29 C34 C48 C53 C67 C72 = SparkFun-Capacitors; PROD_ID: CAP-00868
C11 C13 C35 C36 C54 C55 C73 C74 = SparkFun-Capacitors; PROD_ID: CAP-07881
C17 C30 C49 C68 = SparkFun-Capacitors; PROD_ID: CAP-00867
C28 C37 C56 C75 = SparkFun-Capacitors; PROD_ID: CAP-07886
D1 D6 D11 D16 = SparkFun-DiscreteSemi; PROD_ID: DIO-08053
D2 D8 D13 D18 LED2 LED3 LED5 LED7 = SparkFun-LED; PROD_ID: DIO-09910
D3 D7 D12 D17 = SparkFun-LED; PROD_ID: DIO-09909
D4 D5 D9 D10 D14 D15 D19 D20 = SparkFun-DiscreteSemi; PROD_ID: DIO-11623
E1-E4 = SparkFun-Sensors; PROD_ID: IC-14361
E$1-E$4 JP1 JP7 JP25 JP26 JP41 JP42 JP57 JP58 U$5 U$16 U$58 U$94 = SparkFun-Aesthetics
E$5 E$6 = SparkFun-Retired
F1-F4 = SparkFun-Fuses; PROD_ID: RES-14313
FRAME1-FRAME4 = SparkFun-Aesthetics; DESIGNER: Nobody; VERSION: v01
IC1-IC4 = Testing; PROD_ID: VREG-08170
J1 J2 J7 J10-J12 J16-J18 J22-J24 JP14 JP29 JP45 JP61 TP1-TP44 = SparkFun-Connectors
J3 J6 J13 J19 = SparkFun-Connectors; PROD_ID: CONN-08106; SF_ID: PRT-12748
J4 J8 J14 J20 = SparkFun-Connectors; PROD_ID: CONN-13694
J5 J9 J15 J21 = SparkFun-Connectors; PROD_ID: CONN-14122; VALUE: USB Female Type C Connector
JP2 JP23 JP39 JP55 = SparkFun-Connectors; PROD_ID: CONN-11219
JP3-JP6 JP8 JP9 JP17-JP22 JP33-JP38 JP49-JP54 = SparkFun
JP10 JP11 JP24 JP27 JP40 JP43 JP56 JP59 = SparkFun-Connectors; PROD_ID: CONN-10204
JP12 JP15 JP16 JP30-JP32 JP46-JP48 JP62-JP64 = SparkFun-Jumpers
JP13 JP28 JP44 JP60 = SparkFun-Connectors; PROD_ID: CONN-10203
LED1 LED4 LED6 LED8 = SparkFun-LED; PROD_ID: DIO-09911
Q1-Q4 = SparkFun-DiscreteSemi; PROD_ID: TRANS-08285
R1 R6 R12 R16 R19 R20 R25 R31 R32 R37 R43 R44 = SparkFun-Resistors; PROD_ID: RES-07857
R2 R4 R9 R10 R13 R23 R26 R28 R35 R38 R40 R47 = SparkFun-Resistors; PROD_ID: RES-00824
R3 R5 R11 R24 R27 R36 R39 R48 = SparkFun-Resistors; PROD_ID: RES-07828
R7 R8 R21 R22 R33 R34 R45 R46 = SparkFun-Resistors; PROD_ID: RES-12083
R14 R17 R29 R41 = SparkFun-Resistors; PROD_ID: RES-07850
R15 R18 R30 R42 = SparkFun-Resistors; PROD_ID: RES-07849
S1-S4 = SparkFun-Switches; PROD_ID: SWCH-14139
U1 U6 U9 U12 = Testing
U2 U3 U7 U10 = SparkFun-PowerIC; PROD_ID: VREG-12457
U4 U5 U8 U11 = SparkFun-IC-Comms; PROD_ID: IC-14038
U$1 U$3 U$6 U$7 U$59 U$60 U$95 U$96 = blackboardlogo
U$2 U$10 U$29 U$30 U$65 U$66 U$101 U$102 = buzzard_labels (14)
U$4 U$8 U$61 U$97 = madeinusa
U$9 U$26 U$62 U$98 = Labels
U$11 U$12 U$27 U$28 U$45 U$63 U$64 U$68 U$86 U$99 U$100 U$117 = buzzard_labels (13)
U$13 U$17 U$19 U$21 U$23-U$25 U$36-U$39 U$46 U$51 U$52 U$54-U$57 U$67 U$70-U$72 U$77-U$80 U$87-U$93 U$108-U$111 U$118-U$124 = buzzard_labels (2)
U$14 U$15 U$31 U$32 U$40 U$41 U$49 U$53 U$69 U$73 U$81 U$82 U$103 U$104 U$112 U$113 = buzzard_labels (3)
U$18 U$22 U$43 U$44 U$84 U$85 U$115 U$116 = buzzard_labels (6)
U$20 U$42 U$83 U$114 = buzzard_labels (5)
U$33-U$35 U$47 U$48 U$50 U$74-U$76 U$105-U$107 = buzzard_labels (8)
Y1-Y4 = SparkFun-Clocks; PROD_ID: XTAL-13062

## Nets
3.3V: C6.+ C16.1 C18.1 D5.A R2.2 R12.2 R16.2 U3.5 U5.16
3.3V1: C27.+ C29.1 C31.1 D10.A R10.2 R19.2 R20.2 U2.5 U4.16
3.3V2: C47.+ C48.1 C50.1 D15.A R26.2 R31.2 R32.2 U7.5 U8.16
3.3V3: C66.+ C67.1 C69.1 D20.A R38.2 R43.2 R44.2 U10.5 U11.16
5V [power]: C3.+ C4.1 IC3.2 IC3.4 JP10.4A JP10.4B Q1.2 R4.2 R15.2 U3.1 U3.3
5V1 [power]: C20.+ C21.1 IC1.2 IC1.4 JP24.4A JP24.4B Q2.2 R13.2 R18.2 U2.1 U2.3
5V2 [power]: C40.+ C41.1 IC2.2 IC2.4 JP40.4A JP40.4B Q3.2 R28.2 R30.2 U7.1 U7.3
5V3 [power]: C59.+ C60.1 IC4.2 IC4.4 JP56.4A JP56.4B Q4.2 R40.2 R42.2 U10.1 U10.3
!DTR: C1.1 C8.1 R5.2 U5.13
!DTR1: C23.1 C32.1 R24.2 U4.13
!DTR2: C43.1 C51.1 R36.2 U8.13
!DTR3: C62.1 C70.1 R48.2 U11.13
!RESET: C8.2 C28.1 J2.10 JP10.6A JP10.6B R3.1 S1.3 S1.4 TP3.P$1 U1.~RST
!RESET1: C23.2 C37.1 J10.10 JP24.6A JP24.6B R11.1 S2.3 S2.4 TP16.P$1 U6.~RST
!RESET2: C43.2 C56.1 J16.10 JP40.6A JP40.6B R27.1 S3.3 S3.4 TP27.P$1 U9.~RST
!RESET3: C62.2 C75.1 J22.10 JP56.6A JP56.6B R39.1 S4.3 S4.4 TP38.P$1 U12.~RST
BOOT: C1.2 R9.2 U1.BOOT
BOOT1: C32.2 R23.2 U6.BOOT
BOOT2: C51.2 R35.2 U9.BOOT
BOOT3: C70.2 R47.2 U12.BOOT
CC1: J5.A5 R8.2
CC2: J5.B5 R7.2
CC3: J9.B5 R21.2
CC4: J9.A5 R22.2
CC5: J15.B5 R33.2
CC6: J15.A5 R34.2
CC7: J21.B5 R45.2
CC8: J21.A5 R46.2
D1: TP20.P$1 U6.D8
D2: TP21.P$1 U6.D9
D3: TP22.P$1 U6.D10
D4: TP19.P$1 U6.D38
D5: TP31.P$1 U9.D8
D6: TP32.P$1 U9.D9
D7: TP33.P$1 U9.D10
D8: TP30.P$1 U9.D38
D9: TP42.P$1 U12.D8
D10: TP43.P$1 U12.D9
D11: TP44.P$1 U12.D10
D12: TP41.P$1 U12.D38
D14/SDA: J4.3 JP2.2A JP2.2B U1.D40
D14/SDA1: J8.3 JP23.2A JP23.2B U6.D40
D14/SDA2: J14.3 JP39.2A JP39.2B U9.D40
D14/SDA3: J20.3 JP55.2A JP55.2B U12.D40
D18/A1: JP28.3A JP28.3B U6.AD34
D18/A2: JP13.3A JP13.3B U1.AD34
D18/A3: JP44.3A JP44.3B U9.AD34
D18/A4: JP60.3A JP60.3B U12.AD34
D20/A1: JP28.5A JP28.5B U6.AD16
D20/A2: JP44.5A JP44.5B U9.AD16
D20/A3: JP60.5A JP60.5B U12.AD16
D20/A4: JP13.5A JP13.5B U1.AD16
D24: TP12.P$1 U1.D8
D25: TP13.P$1 U1.D9
D26: TP14.P$1 U1.D10
D27: TP11.P$1 U1.D38
D+: J5.A6 J5.B6 JP14.D+ U5.5
D+1: J9.A6 J9.B6 JP29.D+ U4.5
D+2: J15.A6 J15.B6 JP45.D+ U8.5
D+3: J21.A6 J21.B6 JP61.D+ U11.5
D-: J5.A7 J5.B7 JP14.D- U5.6
D-1: J9.A7 J9.B7 JP29.D- U4.6
D-2: J15.A7 J15.B7 JP45.D- U8.6
D-3: J21.A7 J21.B7 JP61.D- U11.6
GND: BT1.2 C2.1 C3.- C4.2 C5.- C6.- C7.2 C9.2 C10.2 C11.1 C12.2 C13.1 C15.- C16.2 C17.2 C18.2 C19.2 C28.2 E1.3 E1.6 E1.7 E1.8 J2.3 J2.5 J2.9 J3.GND J4.1 J5.GND J5.GND2 JP2.4A JP2.4B JP10.2A JP10.2B JP10.3A JP10.3B JP14.GND JP16.1 LED1.C LED2.C R5.1 R7.1 R8.1 R9.1 R14.1 S1.1 S1.2 U1.GND@1 U1.GND@22 U1.GND@38 U1.GND@39 U1.GND@47 U1.GND@59 U3.2 U5.1
GND1: BT2.2 C14.1 C20.- C21.2 C22.- C24.2 C25.2 C26.- C27.- C29.2 C30.2 C31.2 C33.2 C34.2 C35.1 C36.1 C37.2 C38.2 E2.3 E2.6 E2.7 E2.8 J6.GND J8.1 J9.GND J9.GND2 J10.3 J10.5 J10.9 JP23.4A JP23.4B JP24.2A JP24.2B JP24.3A JP24.3B JP29.GND JP32.1 LED3.C LED4.C R17.1 R21.1 R22.1 R23.1 R24.1 S2.1 S2.2 U2.2 U4.1 U6.GND@1 U6.GND@22 U6.GND@38 U6.GND@39 U6.GND@47 U6.GND@59
GND2: BT3.2 C39.1 C40.- C41.2 C42.- C44.2 C45.2 C46.- C47.- C48.2 C49.2 C50.2 C52.2 C53.2 C54.1 C55.1 C56.2 C57.2 E3.3 E3.6 E3.7 E3.8 J13.GND J14.1 J15.GND J15.GND2 J16.3 J16.5 J16.9 JP39.4A JP39.4B JP40.2A JP40.2B JP40.3A JP40.3B JP45.GND JP48.1 LED5.C LED6.C R29.1 R33.1 R34.1 R35.1 R36.1 S3.1 S3.2 U7.2 U8.1 U9.GND@1 U9.GND@22 U9.GND@38 U9.GND@39 U9.GND@47 U9.GND@59
GND3: BT4.2 C58.1 C59.- C60.2 C61.- C63.2 C64.2 C65.- C66.- C67.2 C68.2 C69.2 C71.2 C72.2 C73.1 C74.1 C75.2 C76.2 E4.3 E4.6 E4.7 E4.8 J19.GND J20.1 J21.GND J21.GND2 J22.3 J22.5 J22.9 JP55.4A JP55.4B JP56.2A JP56.2B JP56.3A JP56.3B JP61.GND JP64.1 LED7.C LED8.C R41.1 R45.1 R46.1 R47.1 R48.1 S4.1 S4.2 U10.2 U11.1 U12.GND@1 U12.GND@22 U12.GND@38 U12.GND@39 U12.GND@47 U12.GND@59
INSERT: J3.P$4 Q1.1 R4.1
INSERT1: J6.P$4 Q2.1 R13.1
INSERT2: J13.P$4 Q3.1 R28.1
INSERT3: J19.P$4 Q4.1 R40.1
N$1: LED1.A R1.2
N$2: LED2.A R2.1
N$3: D4.C D5.C J1.2 JP15.1
N$5: D2.A R16.1
N$6: C17.1 U5.4
N$7: C11.2 U1.XO Y1.P$2
N$8: C13.2 U1.XI Y1.P$1
N$9: D3.A R12.1
N$10: JP2.3A JP2.3B JP16.2
N$11: LED3.A R10.1
N$12: LED4.A R6.2
N$13: IC1.1 R17.2 R18.1
N$14: D8.A R20.1
N$15: IC3.1 R14.2 R15.1
N$16: D7.A R19.1
N$17: C30.1 U4.4
N$18: D9.C D10.C J11.2 JP31.1
N$20: C35.2 U6.XO Y2.P$2
N$21: C36.2 U6.XI Y2.P$1
N$22: JP23.3A JP23.3B JP32.2
N$23: LED5.A R26.1
N$24: LED6.A R25.2
N$25: IC2.1 R29.2 R30.1
N$26: D13.A R32.1
N$27: D12.A R31.1
N$28: C49.1 U8.4
N$29: D14.C D15.C J17.2 JP47.1
N$31: C54.2 U9.XO Y3.P$2
N$32: C55.2 U9.XI Y3.P$1
N$33: JP39.3A JP39.3B JP48.2
N$34: LED7.A R38.1
N$35: LED8.A R37.2
N$36: IC4.1 R41.2 R42.1
N$37: D18.A R44.1
N$38: D17.A R43.1
N$39: C68.1 U11.4
N$40: D19.C D20.C J23.2 JP63.1
N$42: C73.2 U12.XO Y4.P$2
N$43: C74.2 U12.XI Y4.P$1
N$44: JP55.3A JP55.3B JP64.2
PDMCLK: E1.4 U1.~D37
PDMCLK1: E2.4 U6.~D37
PDMCLK2: E3.4 U9.~D37
PDMCLK3: E4.4 U12.~D37
PDMDATA: E1.1 U1.D36
PDMDATA1: E2.1 U6.D36
PDMDATA2: E3.1 U9.D36
PDMDATA3: E4.1 U12.D36
PWRIN [power]: D1.A J3.VIN0
PWRIN1 [power]: D6.A J6.VIN0
PWRIN2 [power]: D11.A J13.VIN0
PWRIN3 [power]: D16.A J19.VIN0
RXI-0: D3.C J7.1 TP5.P$1 U1.RXI-0 U5.2
RXI-1: D7.C J12.1 TP10.P$1 U4.2 U6.RXI-0
RXI-2: D12.C J18.1 TP25.P$1 U8.2 U9.RXI-0
RXI-3: D17.C J24.1 TP36.P$1 U11.2 U12.RXI-0
SHLD: J5.SHLD1 J5.SHLD2 J5.SHLD3 J5.SHLD4 J5.SHLD5 J5.SHLD6 J5.SHLD7 J5.SHLD8
SHLD1: J9.SHLD1 J9.SHLD2 J9.SHLD3 J9.SHLD4 J9.SHLD5 J9.SHLD6 J9.SHLD7 J9.SHLD8
SHLD2: J15.SHLD1 J15.SHLD2 J15.SHLD3 J15.SHLD4 J15.SHLD5 J15.SHLD6 J15.SHLD7 J15.SHLD8
SHLD3: J21.SHLD1 J21.SHLD2 J21.SHLD3 J21.SHLD4 J21.SHLD5 J21.SHLD6 J21.SHLD7 J21.SHLD8
SWDCK: J2.4 TP1.P$1 U1.SWDCK
SWDCK1: J10.4 TP4.P$1 U6.SWDCK
SWDCK2: J16.4 TP23.P$1 U9.SWDCK
SWDCK3: J22.4 TP34.P$1 U12.SWDCK
SWDIO: J2.2 TP2.P$1 U1.SWDIO
SWDIO1: J10.2 TP7.P$1 U6.SWDIO
SWDIO2: J16.2 TP24.P$1 U9.SWDIO
SWDIO3: J22.2 TP35.P$1 U12.SWDIO
TXO-0: D2.C J7.2 TP6.P$1 U1.TXO-0 U5.3
TXO-1: D8.C J12.2 TP15.P$1 U4.3 U6.TXO-0
TXO-2: D13.C J18.2 TP26.P$1 U8.3 U9.TXO-0
TXO-3: D18.C J24.2 TP37.P$1 U11.3 U12.TXO-0
USBVCC [power]: C12.1 C15.+ F2.2 JP12.2 Q1.3
USBVCC1 [power]: C25.1 C26.+ F1.2 JP30.2 Q2.3
USBVCC2 [power]: C45.1 C46.+ F3.2 JP46.2 Q3.3
USBVCC3 [power]: C64.1 C65.+ F4.2 JP62.2 Q4.3
V_BATT: BT1.1 D4.A
V_BATT1: BT2.1 D9.A
V_BATT2: BT3.1 D14.A
V_BATT3: BT4.1 D19.A
VDD: C2.2 C7.1 C9.1 C19.1 E1.2 E1.5 J1.1 J2.1 J4.2 JP10.5A JP10.5B JP10.7A JP10.7B JP15.2 R3.2 U1.VDD@36 U1.VDD@37
VDD1: C14.2 C33.1 C34.1 C38.1 E2.2 E2.5 J8.2 J10.1 J11.1 JP24.5A JP24.5B JP24.7A JP24.7B JP31.2 R11.2 U6.VDD@36 U6.VDD@37
VDD2: C39.2 C52.1 C53.1 C57.1 E3.2 E3.5 J14.2 J16.1 J17.1 JP40.5A JP40.5B JP40.7A JP40.7B JP47.2 R27.2 U9.VDD@36 U9.VDD@37
VDD3: C58.2 C71.1 C72.1 C76.1 E4.2 E4.5 J20.2 J22.1 J23.1 JP56.5A JP56.5B JP56.7A JP56.7B JP63.2 R39.2 U12.VDD@36 U12.VDD@37
VIN [power]: C5.+ D1.C IC3.3 JP10.1A JP10.1B
VIN1 [power]: C22.+ D6.C IC1.3 JP24.1A JP24.1B
VIN2 [power]: C42.+ D11.C IC2.3 JP40.1A JP40.1B
VIN3 [power]: C61.+ D16.C IC4.3 JP56.1A JP56.1B
VUSB [power]: C10.1 F2.1 J5.VBUS1 J5.VBUS2 JP12.1 JP14.VBUS
VUSB1 [power]: C24.1 F1.1 J9.VBUS1 J9.VBUS2 JP29.VBUS JP30.1
VUSB2 [power]: C44.1 F3.1 J15.VBUS1 J15.VBUS2 JP45.VBUS JP46.1
VUSB3 [power]: C63.1 F4.1 J21.VBUS1 J21.VBUS2 JP61.VBUS JP62.1
~D0/RXI-1: JP11.1A JP11.1B U1.~D25
~D0/RXI-2: JP27.1A JP27.1B U6.~D25
~D0/RXI-3: JP43.1A JP43.1B U9.~D25
~D0/RXI-4: JP59.1A JP59.1B U12.~D25
~D1: JP27.4A JP27.4B U6.~D4
~D1/TXO-1: JP11.2A JP11.2B U1.~D24
~D1/TXO-2: JP27.2A JP27.2B U6.~D24
~D1/TXO-3: JP43.2A JP43.2B U9.~D24
~D1/TXO-4: JP59.2A JP59.2B U12.~D24
~D2: JP27.5A JP27.5B U6.~D22
~D2/A1: JP27.3A JP27.3B U6.~AD35
~D2/A2: JP43.3A JP43.3B U9.~AD35
~D2/A3: JP59.3A JP59.3B U12.~AD35
~D2/A6: JP11.3A JP11.3B U1.~AD35
~D3: JP11.4A JP11.4B U1.~D4
~D4: JP11.5A JP11.5B U1.~D22
~D5: JP11.6A JP11.6B U1.~D23
~D6: JP11.7A JP11.7B U1.~D27
~D7: JP11.8A JP11.8B U1.~D28
~D8: JP27.6A JP27.6B U6.~D23
~D8/A1: JP23.10A JP23.10B U6.~AD32
~D8/A2: JP39.10A JP39.10B U9.~AD32
~D8/A3: JP55.10A JP55.10B U12.~AD32
~D8/A8: JP2.10A JP2.10B U1.~AD32
~D9: JP27.7A JP27.7B U6.~D27
~D9/A1: JP23.9A JP23.9B U6.~AD12
~D9/A2: JP39.9A JP39.9B U9.~AD12
~D9/A3: JP55.9A JP55.9B U12.~AD12
~D9/A9: JP2.9A JP2.9B U1.~AD12
~D10: JP27.8A JP27.8B U6.~D28
~D10/A1: JP23.8A JP23.8B U6.~AD13
~D10/A2: JP39.8A JP39.8B U9.~AD13
~D10/A3: JP55.8A JP55.8B U12.~AD13
~D10/A10: JP2.8A JP2.8B U1.~AD13
~D11: TP18.P$1 U6.~D42
~D11/MOSI: JP2.7A JP2.7B U1.D7
~D11/MOSI1: JP23.7A JP23.7B U6.D7
~D11/MOSI2: JP39.7A JP39.7B U9.D7
~D11/MOSI3: JP55.7A JP55.7B U12.D7
~D12: TP17.P$1 U6.~D43
~D12/MISO: JP2.6A JP2.6B U1.~D6
~D12/MISO1: JP23.6A JP23.6B U6.~D6
~D12/MISO2: JP39.6A JP39.6B U9.~D6
~D12/MISO3: JP55.6A JP55.6B U12.~D6
~D13: JP43.4A JP43.4B U9.~D4
~D13/SCK: JP2.5A JP2.5B R1.1 U1.~D5
~D13/SCK1: JP23.5A JP23.5B R6.1 U6.~D5
~D13/SCK2: JP39.5A JP39.5B R25.1 U9.~D5
~D13/SCK3: JP55.5A JP55.5B R37.1 U12.~D5
~D14: JP43.5A JP43.5B U9.~D22
~D15: JP43.6A JP43.6B U9.~D23
~D15/SCL: J4.4 JP2.1A JP2.1B U1.~D39
~D15/SCL1: J8.4 JP23.1A JP23.1B U6.~D39
~D15/SCL2: J14.4 JP39.1A JP39.1B U9.~D39
~D15/SCL3: J20.4 JP55.1A JP55.1B U12.~D39
~D16: JP43.7A JP43.7B U9.~D27
~D16/A0: JP13.1A JP13.1B U1.~AD29
~D16/A1: JP28.1A JP28.1B U6.~AD29
~D16/A2: JP44.1A JP44.1B U9.~AD29
~D16/A3: JP60.1A JP60.1B U12.~AD29
~D17: JP43.8A JP43.8B U9.~D28
~D17/A1: JP13.2A JP13.2B U1.~AD11
~D17/A2: JP28.2A JP28.2B U6.~AD11
~D17/A3: JP44.2A JP44.2B U9.~AD11
~D17/A4: JP60.2A JP60.2B U12.~AD11
~D18: TP29.P$1 U9.~D42
~D19: TP28.P$1 U9.~D43
~D19/A1: J10.6 JP28.4A JP28.4B U6.~AD33/SWO
~D19/A2: J16.6 JP44.4A JP44.4B U9.~AD33/SWO
~D19/A3: J2.6 JP13.4A JP13.4B U1.~AD33/SWO
~D19/A4: J22.6 JP60.4A JP60.4B U12.~AD33/SWO
~D20: JP59.4A JP59.4B U12.~D4
~D21: JP59.5A JP59.5B U12.~D22
~D21/A1: JP28.6A JP28.6B U6.~AD31
~D21/A2: JP44.6A JP44.6B U9.~AD31
~D21/A3: JP60.6A JP60.6B U12.~AD31
~D21/A5: JP13.6A JP13.6B U1.~AD31
~D22: JP59.6A JP59.6B U12.~D23
~D23: JP59.7A JP59.7B U12.~D27
~D24: JP59.8A JP59.8B U12.~D28
~D25: TP40.P$1 U12.~D42
~D26: TP39.P$1 U12.~D43
~D28: TP9.P$1 U1.~D42
~D29: TP8.P$1 U1.~D43

## Tracks (layer width: path | path; a pad name or v marks a point on that pad's centre or on a via)
3.3V  (via drill 0.3)
  Top 0.203: v26.42,50.67 U5.16 23.75,50.67 22.95,51.47 C18.1 | C6.+ 31.12,31.11 30.14,32.09 R12.2 30.14,33.57 30.48,33.91 30.48,35.81 30.14,36.16 R16.2 30.14,37.38 30.99,38.23 v30.99,43.05 | R2.2 v51.31,21.59 | v37.34,20.83 D5.A
  Top 0.508: 30.99,25.62 U3.5
  Top 0.813: C6.+ 31.12,28.07 30.57,27.52 C16.1 30.57,26.33 30.99,25.91 30.99,25.62 | U3.5 31.94,25.59 34.16,23.37 36.19,23.37 D5.A
  Bottom 0.203: v26.42,50.67 29.08,50.67 30.99,48.77 v30.99,43.05 | v51.31,21.59 46.74,17.02 39.88,17.02 37.34,19.56 v37.34,20.83
3.3V1  (via drill 0.3)
  Top 0.203: v98.04,50.67 U4.16 95.38,50.67 94.58,51.47 C31.1 | C27.+ 102.75,31.11 101.77,32.09 R19.2 101.77,33.57 102.11,33.91 102.11,35.81 101.77,36.16 R20.2 101.77,37.38 102.62,38.23 v102.62,43.05 | R10.2 v122.94,21.59 | v108.97,20.83 D10.A
  Top 0.508: 102.62,25.62 U2.5
  Top 0.813: C27.+ 102.75,28.07 102.2,27.52 C29.1 102.2,26.33 102.62,25.91 102.62,25.62 | U2.5 103.57,25.59 105.79,23.37 107.82,23.37 D10.A
  Bottom 0.203: v98.04,50.67 100.71,50.67 102.62,48.77 v102.62,43.05 | v122.94,21.59 118.36,17.02 111.51,17.02 108.97,19.56 v108.97,20.83
3.3V2  (via drill 0.3)
  Top 0.203: v26.42,104.52 U8.16 23.75,104.52 22.95,105.32 C50.1 | C47.+ 31.12,84.96 30.14,85.94 R31.2 30.14,87.42 30.48,87.76 30.48,89.66 30.14,90 R32.2 30.14,91.23 30.99,92.08 v30.99,96.9 | R26.2 v51.31,75.44 | v37.34,74.68 D15.A
  Top 0.508: 30.99,79.47 U7.5
  Top 0.813: C47.+ 31.12,81.92 30.57,81.37 C48.1 30.57,80.18 30.99,79.76 30.99,79.47 | U7.5 31.94,79.44 34.16,77.22 36.19,77.22 D15.A
  Bottom 0.203: v26.42,104.52 29.08,104.52 30.99,102.62 v30.99,96.9 | v51.31,75.44 46.74,70.87 39.88,70.87 37.34,73.41 v37.34,74.68
3.3V3  (via drill 0.3)
  Top 0.203: v98.04,104.52 U11.16 95.38,104.52 94.58,105.32 C69.1 | C66.+ 102.75,84.96 101.77,85.94 R43.2 101.77,87.42 102.11,87.76 102.11,89.66 101.77,90 R44.2 101.77,91.23 102.62,92.08 v102.62,96.9 | R38.2 v122.94,75.44 | v108.97,74.68 D20.A
  Top 0.508: 102.62,79.47 U10.5
  Top 0.813: C66.+ 102.75,81.92 102.2,81.37 C67.1 102.2,80.18 102.62,79.76 102.62,79.47 | U10.5 103.57,79.44 105.79,77.22 107.82,77.22 D20.A
  Bottom 0.203: v98.04,104.52 100.71,104.52 102.62,102.62 v102.62,96.9 | v122.94,75.44 118.36,70.87 111.51,70.87 108.97,73.41 v108.97,74.68
5V  (via drill 0.3)
  Top 0.406: IC3.2 22.35,28.45 23.58,27.22 R15.2
  Top 0.508: 28.32,23.59 U3.3
  Top 0.762: JP10.4B JP10.4A v47.5,15.75
  Top 0.813: C3.+ 28.32,23.59 | v14.48,31.13 14.75,31.4 Q1.2 13.23,32.83 R4.2 | U3.3 26.98,23.69 26.67,24 v26.67,24.89 26.67,25.4 26.86,25.59 U3.1 | C4.1 18.71,31.54 18.41,31.24
  Bottom 0.762: v47.5,15.75 29.72,15.75 26.67,18.8 v26.67,24.89 21.59,24.89 19.81,26.67 19.81,28.07
  other vias: 11.94,28.59 14.48,26.05 11.94,26.68 11.94,30.49
  pour Bottom (isolate 0.305, no thermals): 10.29,36.83 20.19,36.83 20.19,27.18 22.1,25.27 22.1,24.64 10.29,24.64
  pour Top (isolate 0.305, no thermals): 10.29,24.64 10.29,31.62 20.83,31.62 20.83,24.64
5V1  (via drill 0.3)
  Top 0.406: IC1.2 93.98,28.45 95.21,27.22 R18.2
  Top 0.508: 99.95,23.59 U2.3
  Top 0.762: JP24.4B JP24.4A v119.13,15.75
  Top 0.813: C20.+ 99.95,23.59 | v86.11,31.13 86.38,31.4 Q2.2 84.86,32.83 R13.2 | U2.3 98.61,23.69 98.3,24 v98.3,24.89 98.3,25.4 98.49,25.59 U2.1 | C21.1 90.34,31.54 90.04,31.24
  Bottom 0.762: v119.13,15.75 101.35,15.75 98.3,18.8 v98.3,24.89 93.22,24.89 91.44,26.67 91.44,28.07
  other vias: 83.57,28.59 86.11,26.05 83.57,26.68 83.57,30.49
  pour Bottom (isolate 0.305, no thermals): 81.91,36.83 91.82,36.83 91.82,27.18 93.73,25.27 93.73,24.64 81.91,24.64
  pour Top (isolate 0.305, no thermals): 81.91,24.64 81.91,31.62 92.46,31.62 92.46,24.64
5V2  (via drill 0.3)
  Top 0.406: IC2.2 22.35,82.3 23.58,81.06 R30.2
  Top 0.508: 28.32,77.44 U7.3
  Top 0.762: JP40.4B JP40.4A v47.5,69.6
  Top 0.813: C40.+ 28.32,77.44 | v14.48,84.98 14.75,85.25 Q3.2 13.23,86.68 R28.2 | U7.3 26.98,77.54 26.67,77.85 v26.67,78.74 26.67,79.25 26.86,79.44 U7.1 | C41.1 18.71,85.38 18.41,85.09
  Bottom 0.762: v47.5,69.6 29.72,69.6 26.67,72.64 v26.67,78.74 21.59,78.74 19.81,80.52 19.81,81.92
  other vias: 11.94,82.44 14.48,79.9 11.94,80.53 11.94,84.34
  pour Bottom (isolate 0.305, no thermals): 10.29,90.68 20.19,90.68 20.19,81.03 22.1,79.12 22.1,78.49 10.29,78.49
  pour Top (isolate 0.305, no thermals): 10.29,78.49 10.29,85.47 20.83,85.47 20.83,78.49
5V3  (via drill 0.3)
  Top 0.406: IC4.2 93.98,82.3 95.21,81.06 R42.2
  Top 0.508: 99.95,77.44 U10.3
  Top 0.762: JP56.4B JP56.4A v119.13,69.6
  Top 0.813: C59.+ 99.95,77.44 | v86.11,84.98 86.38,85.25 Q4.2 84.86,86.68 R40.2 | U10.3 98.61,77.54 98.3,77.85 v98.3,78.74 98.3,79.25 98.49,79.44 U10.1 | C60.1 90.34,85.38 90.04,85.09
  Bottom 0.762: v119.13,69.6 101.35,69.6 98.3,72.64 v98.3,78.74 93.22,78.74 91.44,80.52 91.44,81.92
  other vias: 83.57,82.44 86.11,79.9 83.57,80.53 83.57,84.34
  pour Bottom (isolate 0.305, no thermals): 81.91,90.68 91.82,90.68 91.82,81.03 93.73,79.12 93.73,78.49 81.91,78.49
  pour Top (isolate 0.305, no thermals): 81.91,78.49 81.91,85.47 92.46,85.47 92.46,78.49
!DTR
  Top 0.203: R5.2 C1.1 | U5.13 25.91,46.86 26.54,47.5 R5.2 | C8.1 R5.2
!DTR1
  Top 0.203: R24.2 C32.1 | U4.13 97.54,46.86 98.17,47.5 R24.2 | C23.1 R24.2
!DTR2
  Top 0.203: R36.2 C51.1 | U8.13 25.91,100.71 26.54,101.35 R36.2 | C43.1 R36.2
!DTR3
  Top 0.203: R48.2 C70.1 | U11.13 97.54,100.71 98.17,101.35 R48.2 | C62.1 R48.2
!RESET  (via drill 0.3)
  Top 0.203: JP10.6B JP10.6A v42.42,18.29 | S1.4 S1.3 20.19,58.29 20.83,57.66 20.83,54.36 21.34,53.85 23.62,53.85 23.88,54.1 C28.1 26.07,52.58 R3.1 28.19,52.58 29.3,51.47 C8.2 32,49.02 v32.26,48.77 | v52.58,48.77 52.58,42.29 J2.10 | U1.~RST 69.98,30.35 68.71,31.62 68.71,32.64 v67.82,33.53
  Bottom 0.203: v32.26,48.77 v52.58,48.77 | v42.42,18.29 42.42,29.72 43.73,31.03 52.11,31.03 53.85,32.77 | 53.85,32.77 J2.10 TP3.P$1 | 53.85,32.77 67.82,32.77 v67.82,33.53
!RESET1  (via drill 0.3)
  Top 0.203: JP24.6B JP24.6A v114.05,18.29 | S2.4 S2.3 91.82,58.29 92.46,57.66 92.46,54.36 92.96,53.85 95.25,53.85 95.5,54.1 C37.1 97.7,52.58 R11.1 99.82,52.58 100.93,51.47 C23.2 103.63,49.02 v103.89,48.77 | v124.21,48.77 124.21,42.29 J10.10 | U6.~RST 141.6,30.35 140.34,31.62 140.34,32.64 v139.45,33.53
  Bottom 0.203: v103.89,48.77 v124.21,48.77 | v114.05,18.29 114.05,29.72 115.36,31.03 123.74,31.03 125.48,32.77 | 125.48,32.77 J10.10 TP16.P$1 | 125.48,32.77 139.45,32.77 v139.45,33.53
!RESET2  (via drill 0.3)
  Top 0.203: JP40.6B JP40.6A v42.42,72.14 | S3.4 S3.3 20.19,112.14 20.83,111.51 20.83,108.2 21.34,107.7 23.62,107.7 23.88,107.95 C56.1 26.07,106.43 R27.1 28.19,106.43 29.3,105.32 C43.2 32,102.87 v32.26,102.62 | v52.58,102.62 52.58,96.14 J16.10 | U9.~RST 69.98,84.2 68.71,85.47 68.71,86.49 v67.82,87.38
  Bottom 0.203: v32.26,102.62 v52.58,102.62 | v42.42,72.14 42.42,83.57 43.73,84.88 52.11,84.88 53.85,86.61 | 53.85,86.61 J16.10 TP27.P$1 | 53.85,86.61 67.82,86.61 v67.82,87.38
!RESET3  (via drill 0.3)
  Top 0.203: JP56.6B JP56.6A v114.05,72.14 | S4.4 S4.3 91.82,112.14 92.46,111.51 92.46,108.2 92.96,107.7 95.25,107.7 95.5,107.95 C75.1 97.7,106.43 R39.1 99.82,106.43 100.93,105.32 C62.2 103.63,102.87 v103.89,102.62 | v124.21,102.62 124.21,96.14 J22.10 | U12.~RST 141.6,84.2 140.34,85.47 140.34,86.49 v139.45,87.38
  Bottom 0.203: v103.89,102.62 v124.21,102.62 | v114.05,72.14 114.05,83.57 115.36,84.88 123.74,84.88 125.48,86.61 | 125.48,86.61 J22.10 TP38.P$1 | 125.48,86.61 139.45,86.61 v139.45,87.38
BOOT  (via drill 0.3)
  Top 0.203: R9.2 C1.2 32,45.97 v32.26,46.23 | v71.77,42.16 71.48,41.87 U1.BOOT
  Bottom 0.203: v71.77,42.16 71.49,41.88 63.27,41.88 58.93,46.23 v32.26,46.23
BOOT1  (via drill 0.3)
  Top 0.203: R23.2 C32.2 103.63,45.97 v103.89,46.23 | v143.4,42.16 143.1,41.87 U6.BOOT
  Bottom 0.203: v143.4,42.16 143.12,41.88 134.9,41.88 130.56,46.23 v103.89,46.23
BOOT2  (via drill 0.3)
  Top 0.203: R35.2 C51.2 32,99.82 v32.26,100.08 | v71.77,96.01 71.48,95.72 U9.BOOT
  Bottom 0.203: v71.77,96.01 71.49,95.73 63.27,95.73 58.93,100.08 v32.26,100.08
BOOT3  (via drill 0.3)
  Top 0.203: R47.2 C70.2 103.63,99.82 v103.89,100.08 | v143.4,96.01 143.1,95.72 U12.BOOT
  Bottom 0.203: v143.4,96.01 143.12,95.73 134.9,95.73 130.56,100.08 v103.89,100.08
CC1
  Top 0.203: J5.A5 13.36,47.48 12.57,48.26 12.57,51.94 13.21,52.58 R8.2
CC2
  Top 0.203: J5.B5 14.12,44.48 12.83,43.18 12.83,40.55 12.03,39.75 R7.2
CC3
  Top 0.203: J9.B5 85.75,44.48 84.45,43.18 84.45,40.55 83.65,39.75 R21.2
CC4
  Top 0.203: J9.A5 84.98,47.48 84.2,48.26 84.2,51.94 84.84,52.58 R22.2
CC5
  Top 0.203: J15.B5 14.12,98.33 12.83,97.03 12.83,94.4 12.03,93.6 R33.2
CC6
  Top 0.203: J15.A5 13.36,101.33 12.57,102.11 12.57,105.79 13.21,106.43 R34.2
CC7
  Top 0.203: J21.B5 85.75,98.33 84.45,97.03 84.45,94.4 83.65,93.6 R45.2
CC8
  Top 0.203: J21.A5 84.98,101.33 84.2,102.11 84.2,105.79 84.84,106.43 R46.2
D1  (via drill 0.3)
  Top 0.203: U6.D8 141.1,36.46 v140.72,36.07
  Bottom 0.254: TP20.P$1 v140.72,36.07
D2  (via drill 0.3)
  Top 0.203: v143.26,33.53 143.26,35.79 143.2,35.84 143.2,36.83 U6.D9
  Bottom 0.254: TP21.P$1 v143.26,33.53
D3  (via drill 0.3)
  Top 0.203: U6.D10 142.6,35.42 v141.99,34.8
  Bottom 0.254: TP22.P$1 v141.99,34.8
D4  (via drill 0.3)
  Top 0.203: U6.D38 144.6,31.16 142.24,33.53 v141.99,33.53
  Bottom 0.254: TP19.P$1 v141.99,33.53
D5  (via drill 0.3)
  Top 0.203: U9.D8 69.48,90.31 v69.09,89.92
  Bottom 0.254: TP31.P$1 v69.09,89.92
D6  (via drill 0.3)
  Top 0.203: v71.63,87.38 71.63,89.63 71.58,89.69 71.58,90.68 U9.D9
  Bottom 0.254: TP32.P$1 v71.63,87.38
D7  (via drill 0.3)
  Top 0.203: U9.D10 70.98,89.27 v70.36,88.65
  Bottom 0.254: TP33.P$1 v70.36,88.65
D8  (via drill 0.3)
  Top 0.203: U9.D38 72.98,85.01 70.61,87.38 v70.36,87.38
  Bottom 0.254: TP30.P$1 v70.36,87.38
D9  (via drill 0.3)
  Top 0.203: U12.D8 141.1,90.31 v140.72,89.92
  Bottom 0.254: TP42.P$1 v140.72,89.92
D10  (via drill 0.3)
  Top 0.203: v143.26,87.38 143.26,89.63 143.2,89.69 143.2,90.68 U12.D9
  Bottom 0.254: TP43.P$1 v143.26,87.38